# Altium PCB ArgoFCRev2.PcbDoc (part 1 of 6)
Units mm, origin at the board's own origin, x right, y up, seen from the top; angles counter-clockwise.
Board outline 140.21 x 119.63 mm, 4 copper layers (Top Layer, GND Plane, PWR Plane, Bottom Layer), stack 0.603 mm thick; 413 components, 223 nets, 1421 pads, 793 vias.
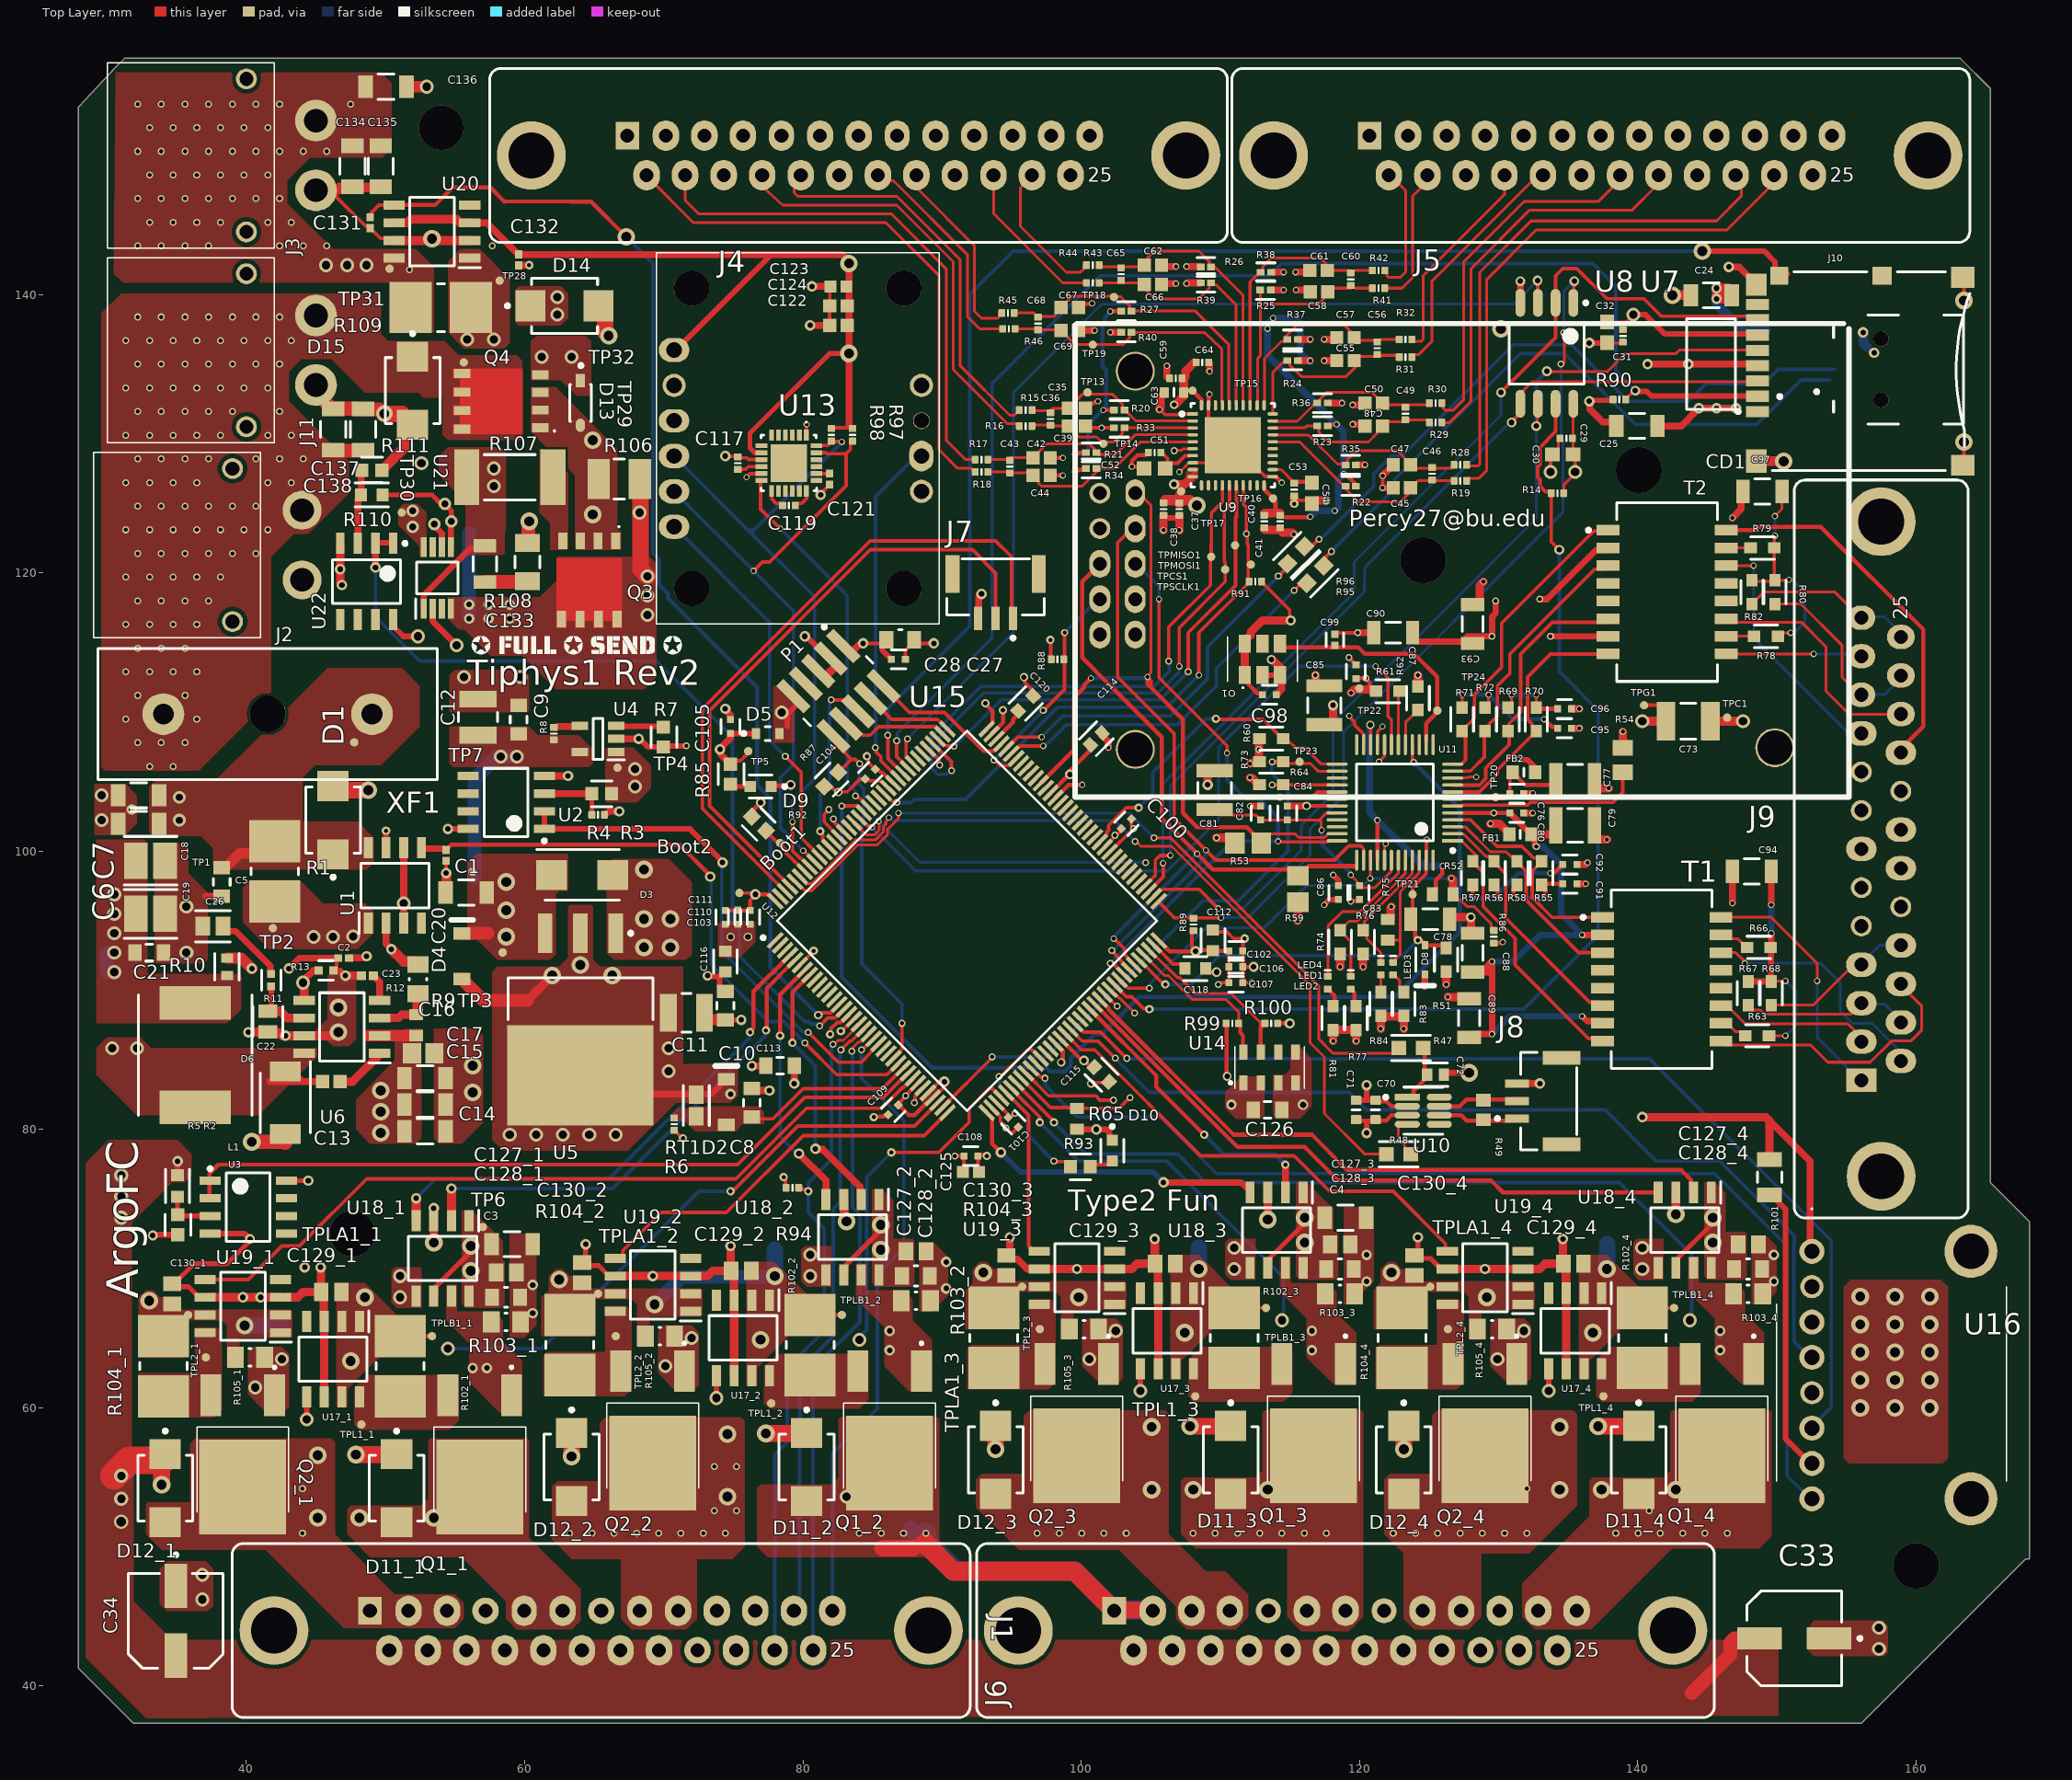
[diagram p0: Top Layer view]
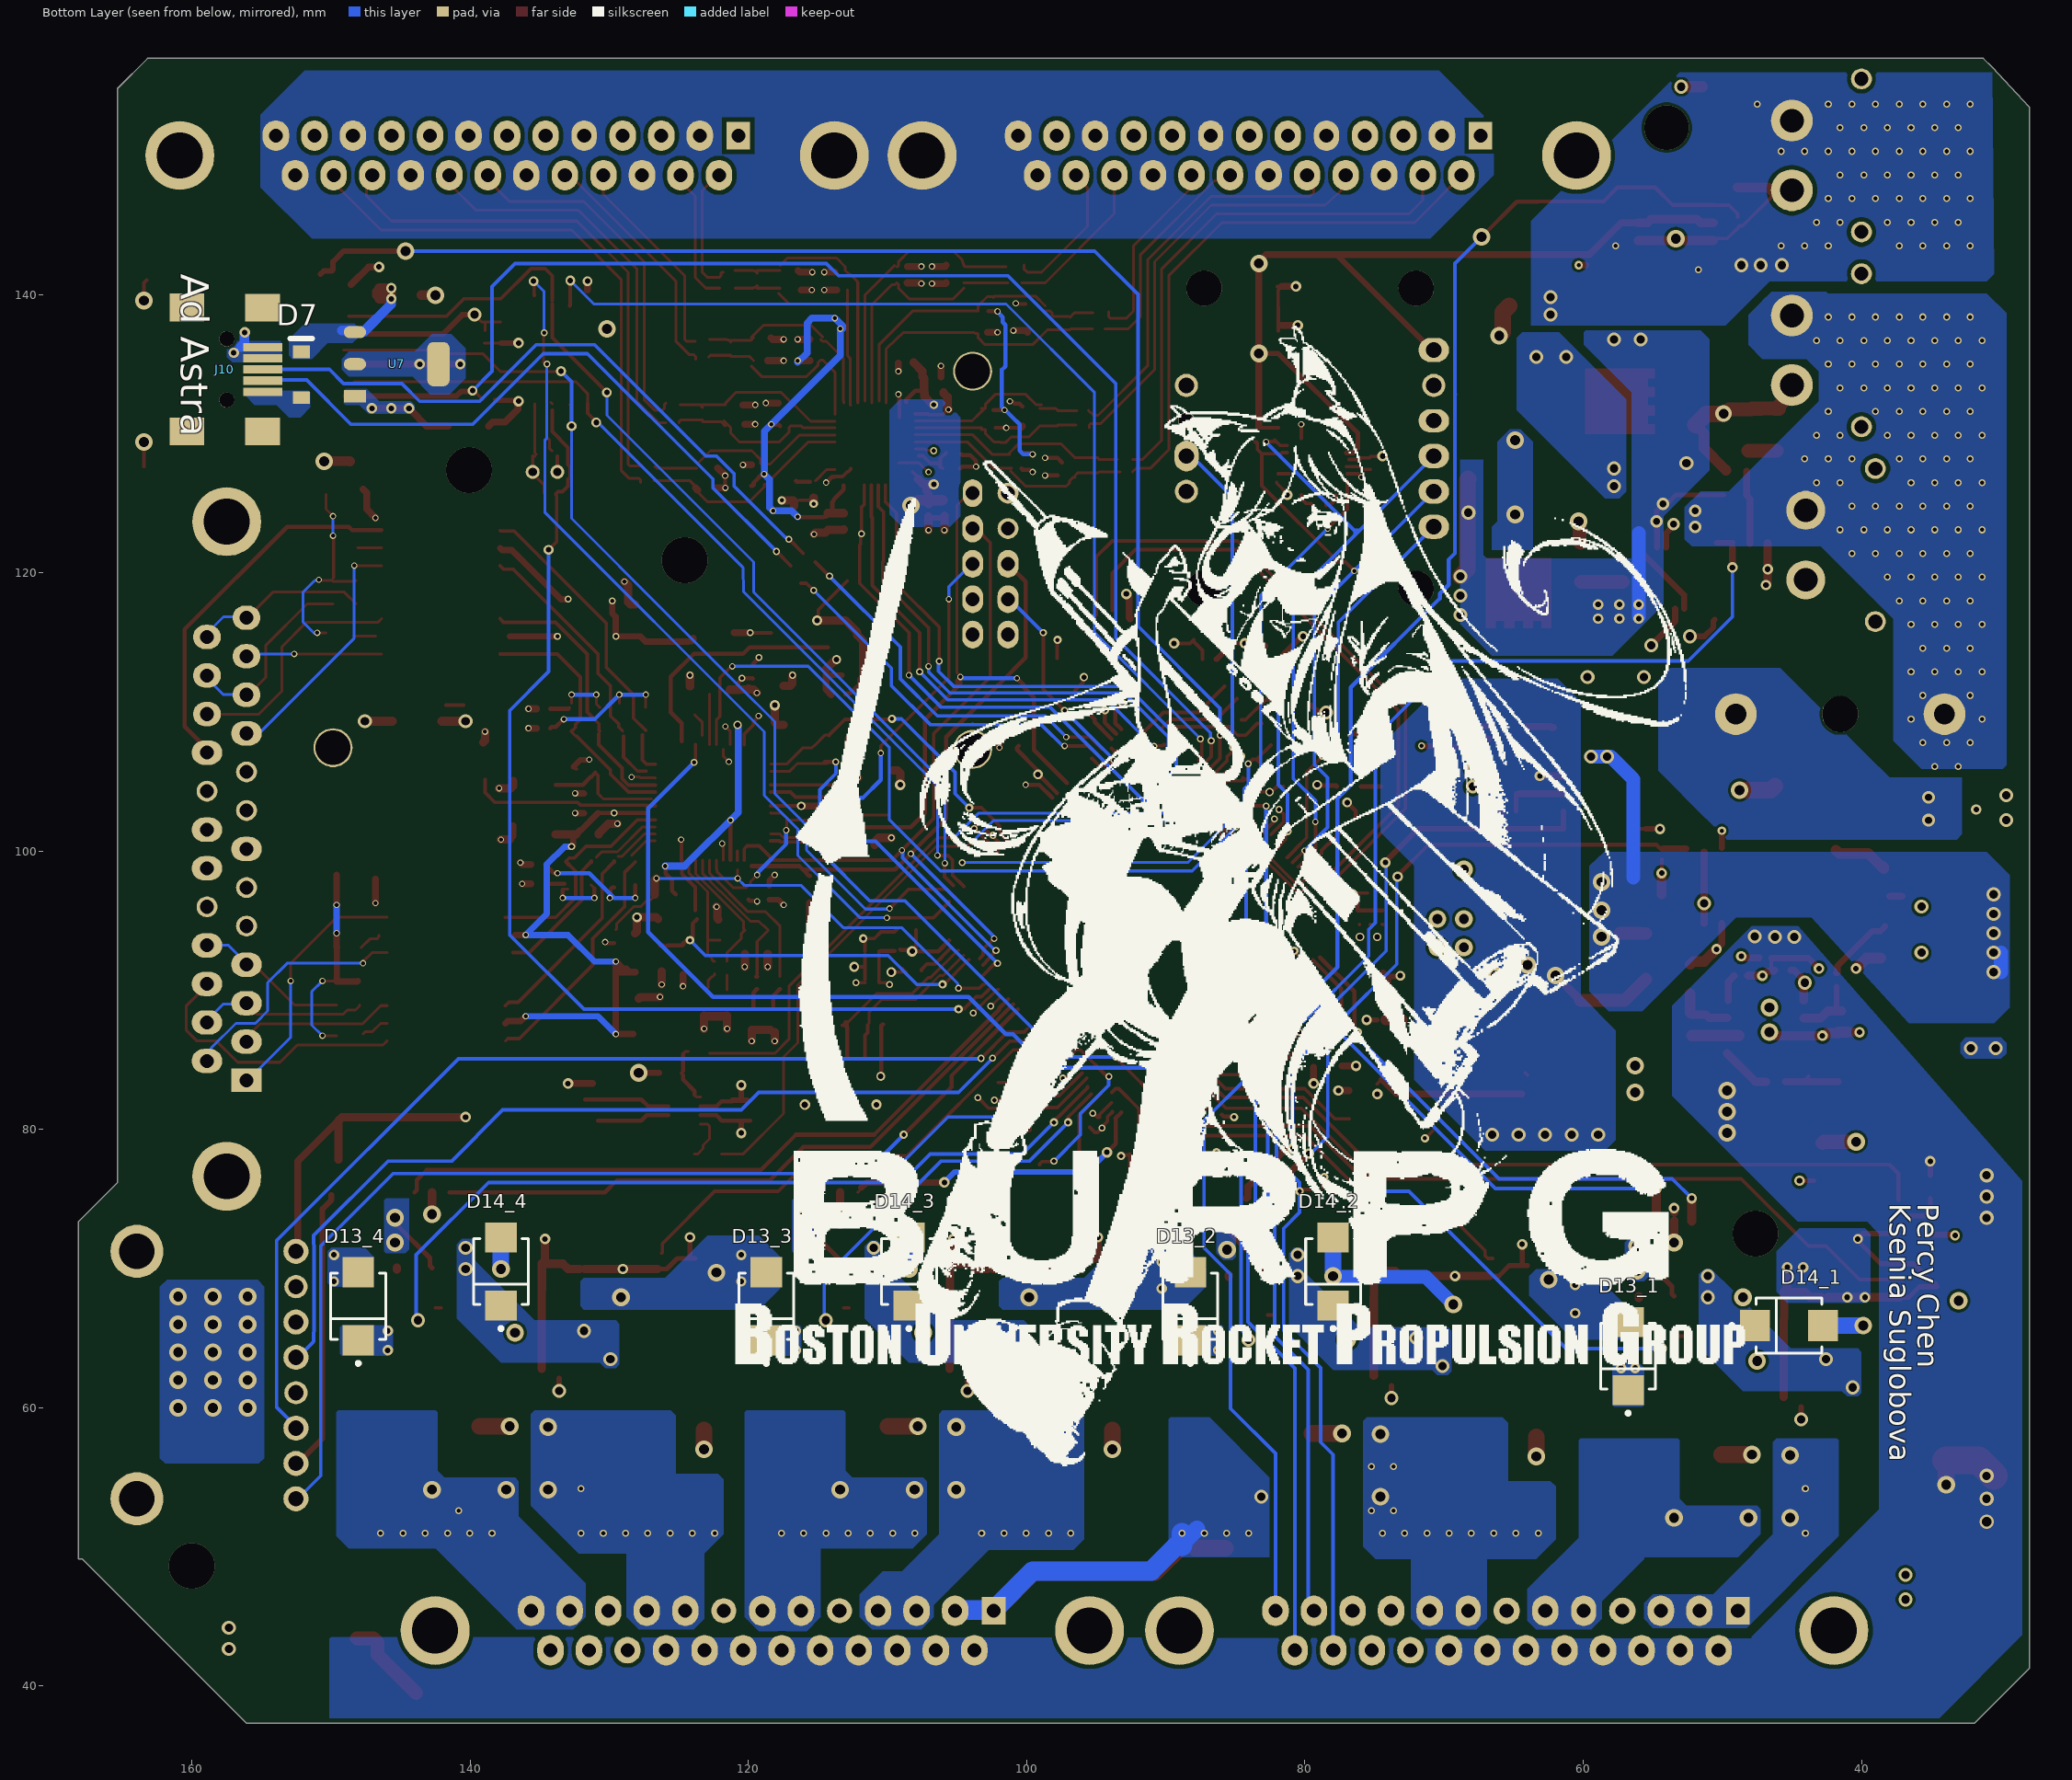
[diagram p1: Bottom Layer view, seen from below]
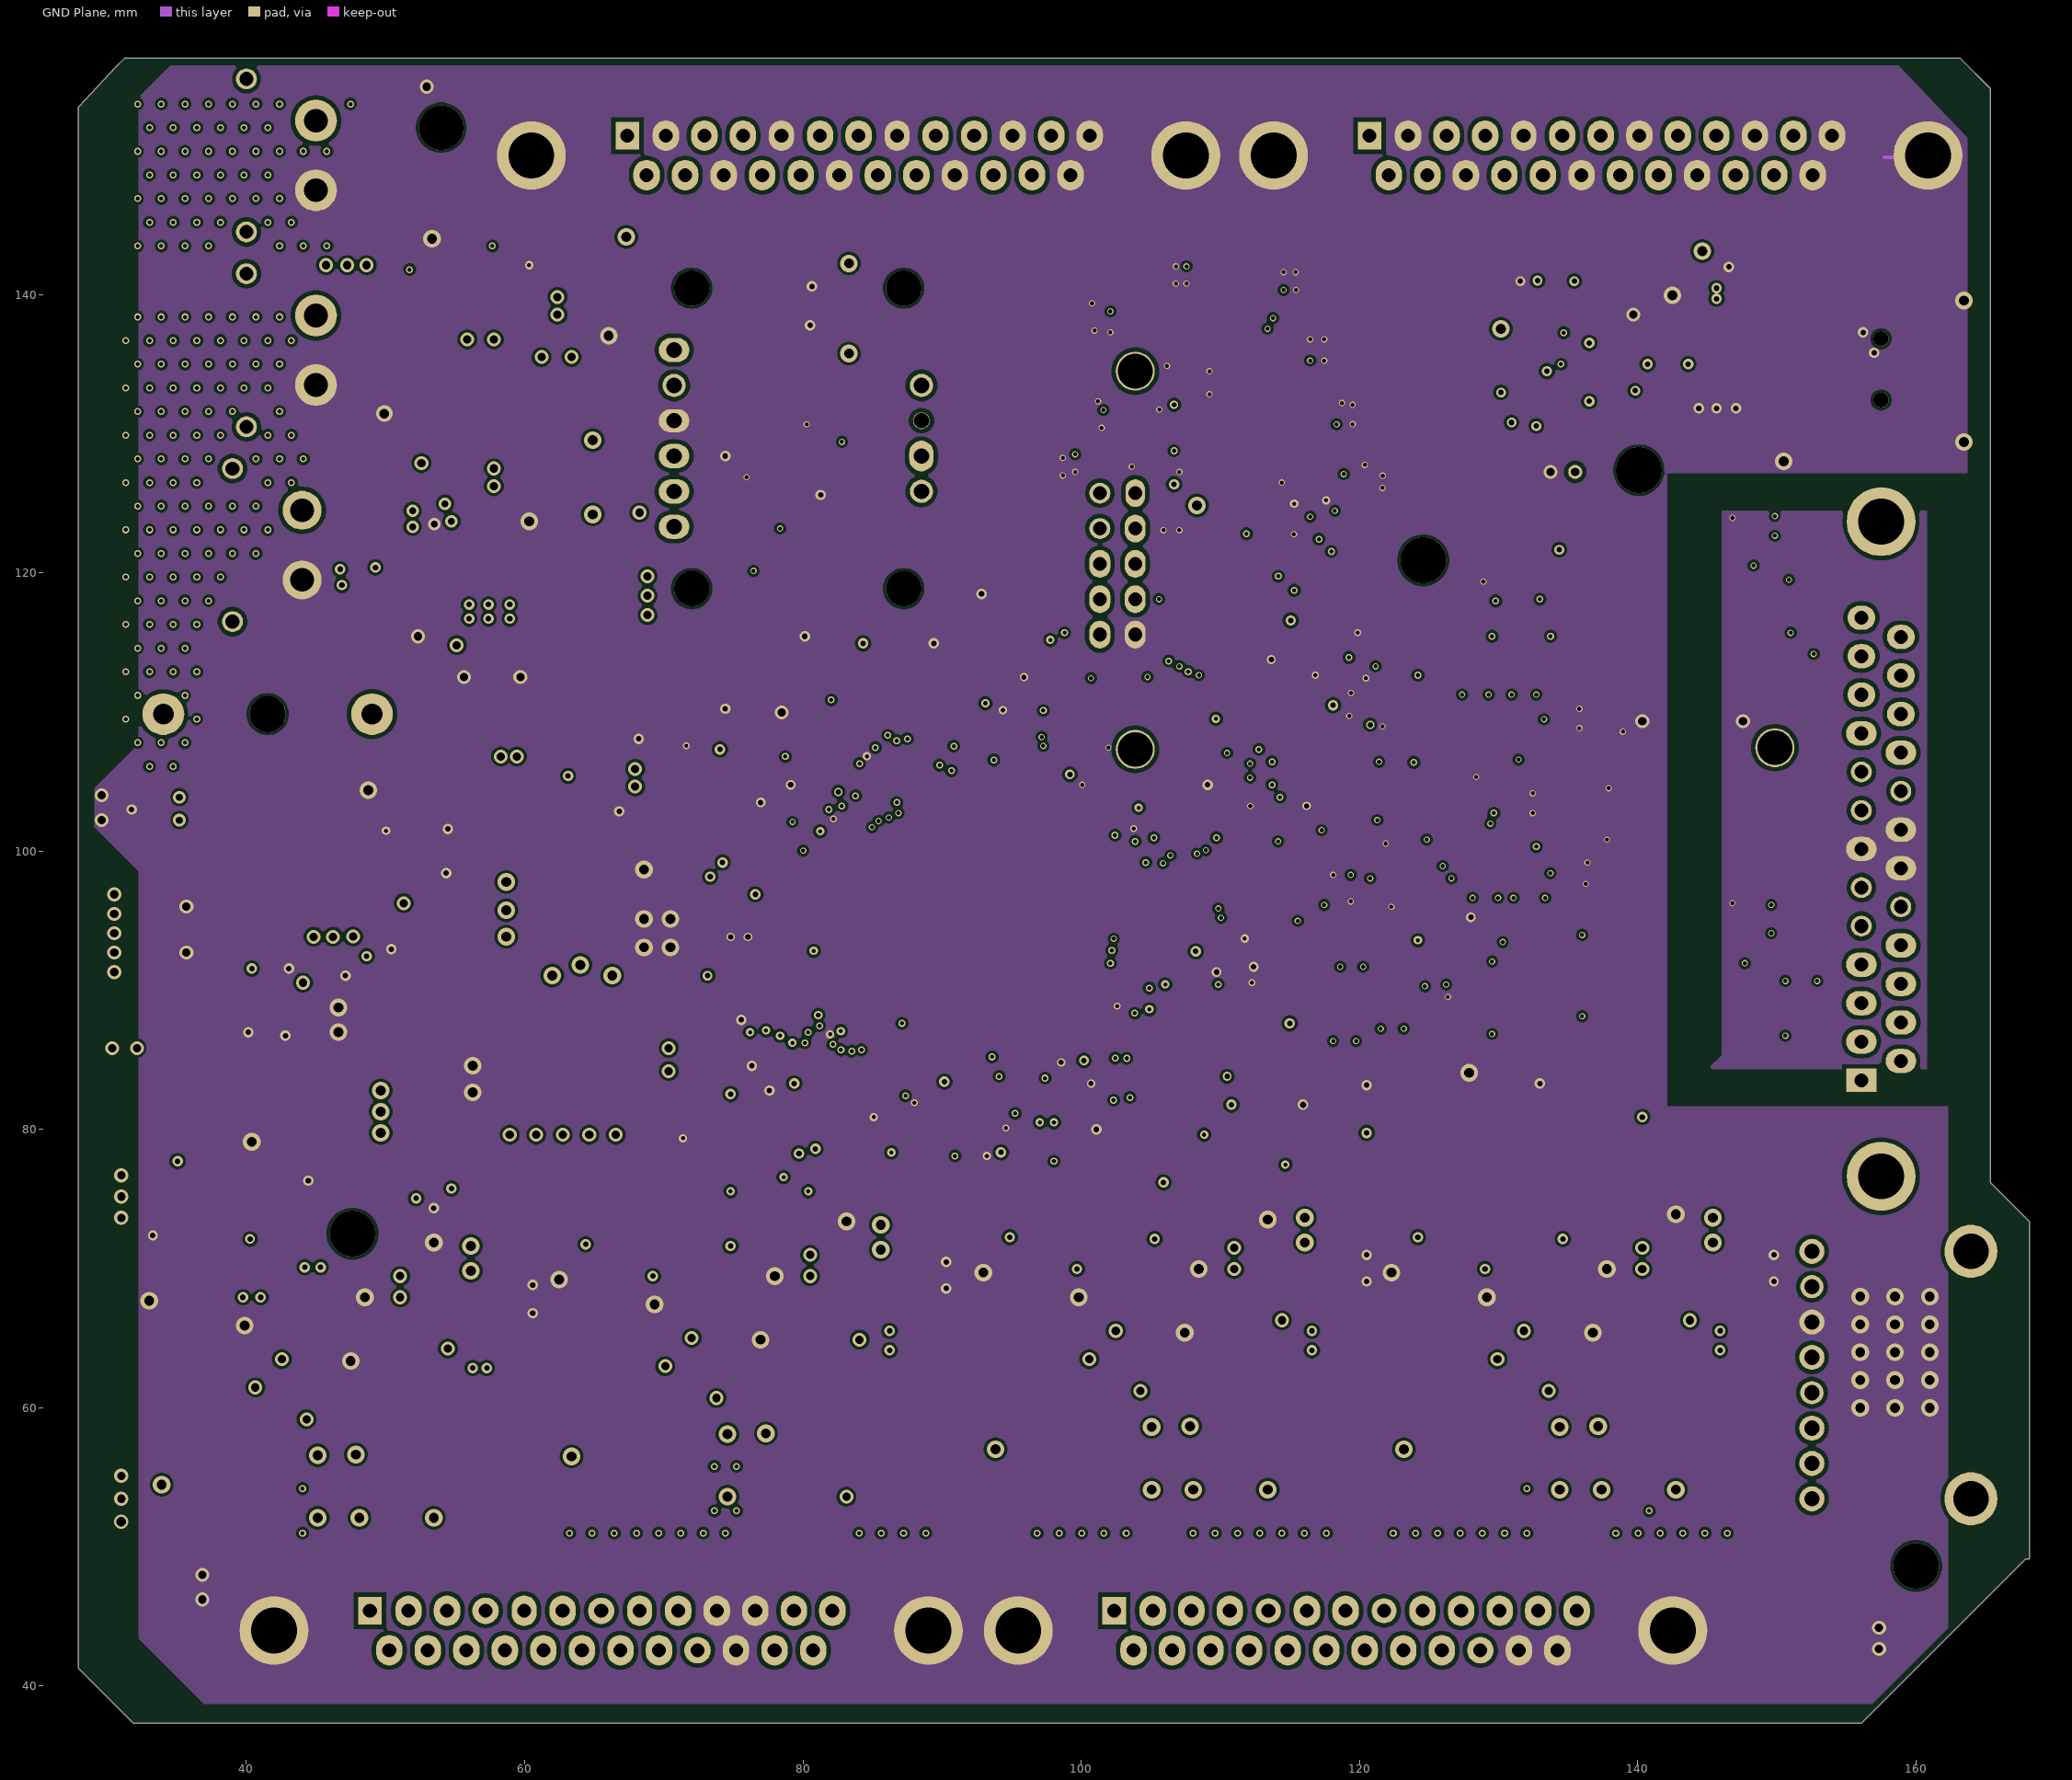
[diagram p2: GND Plane]
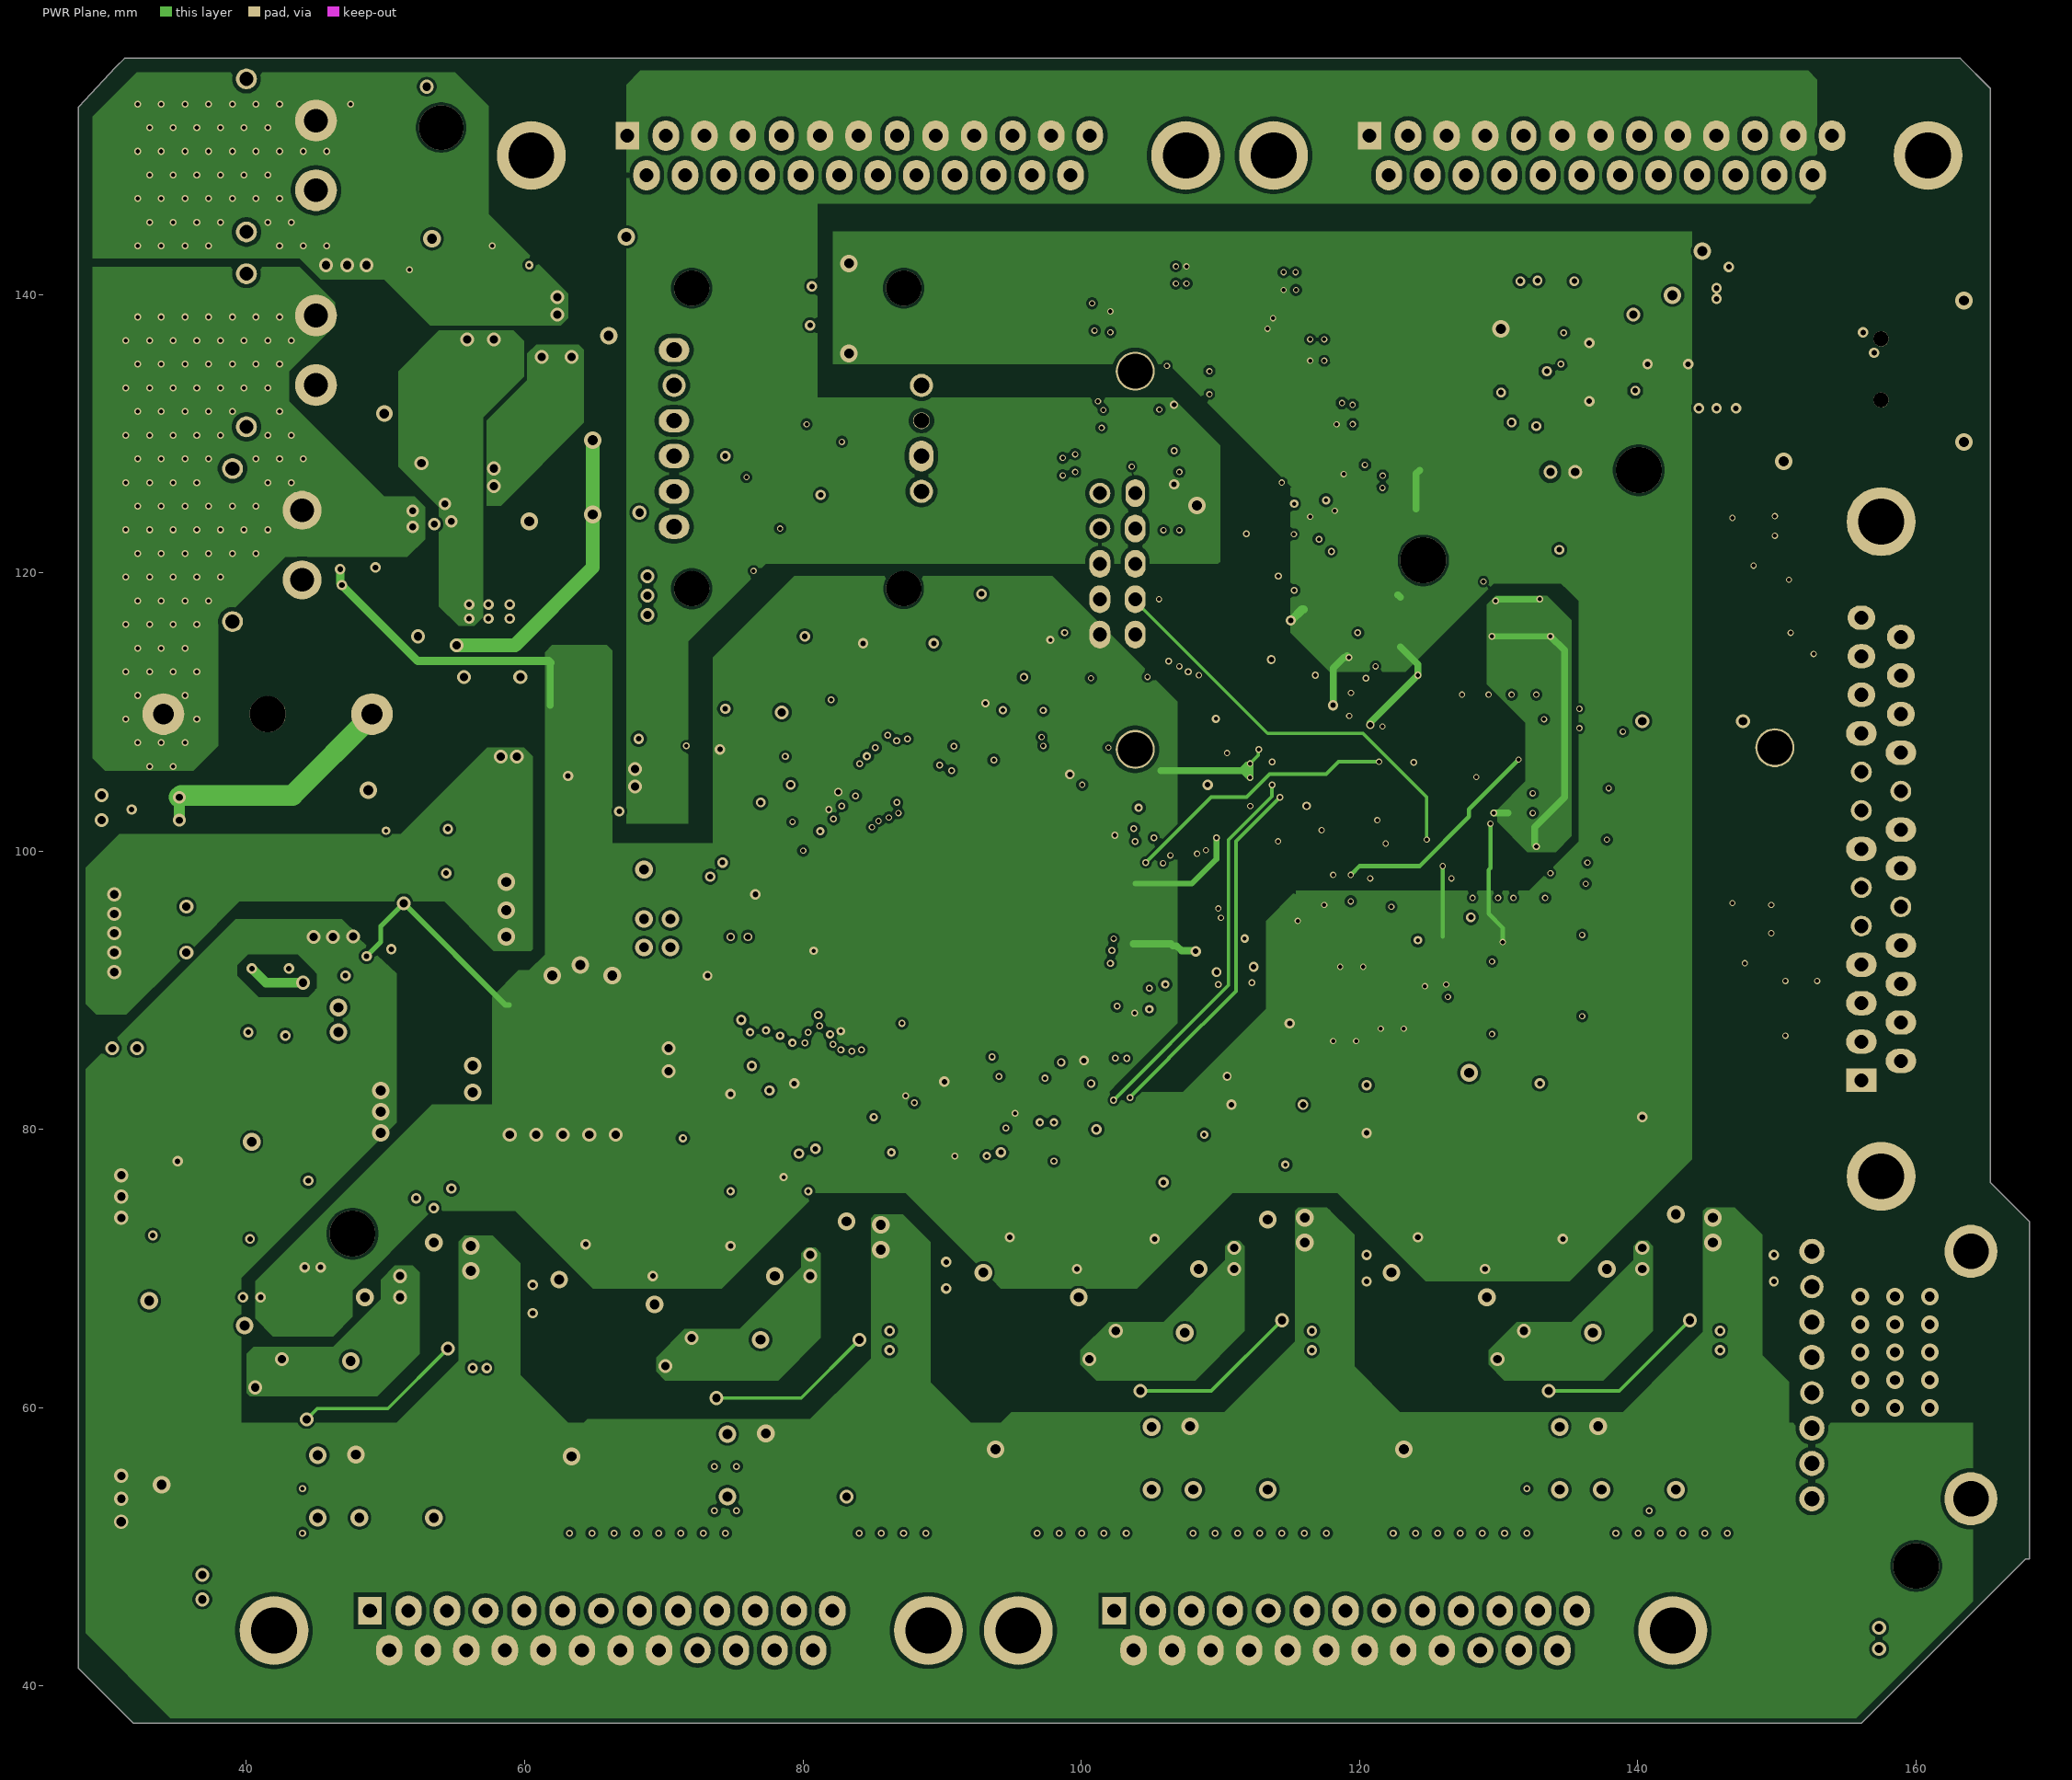
[diagram p3: PWR Plane]
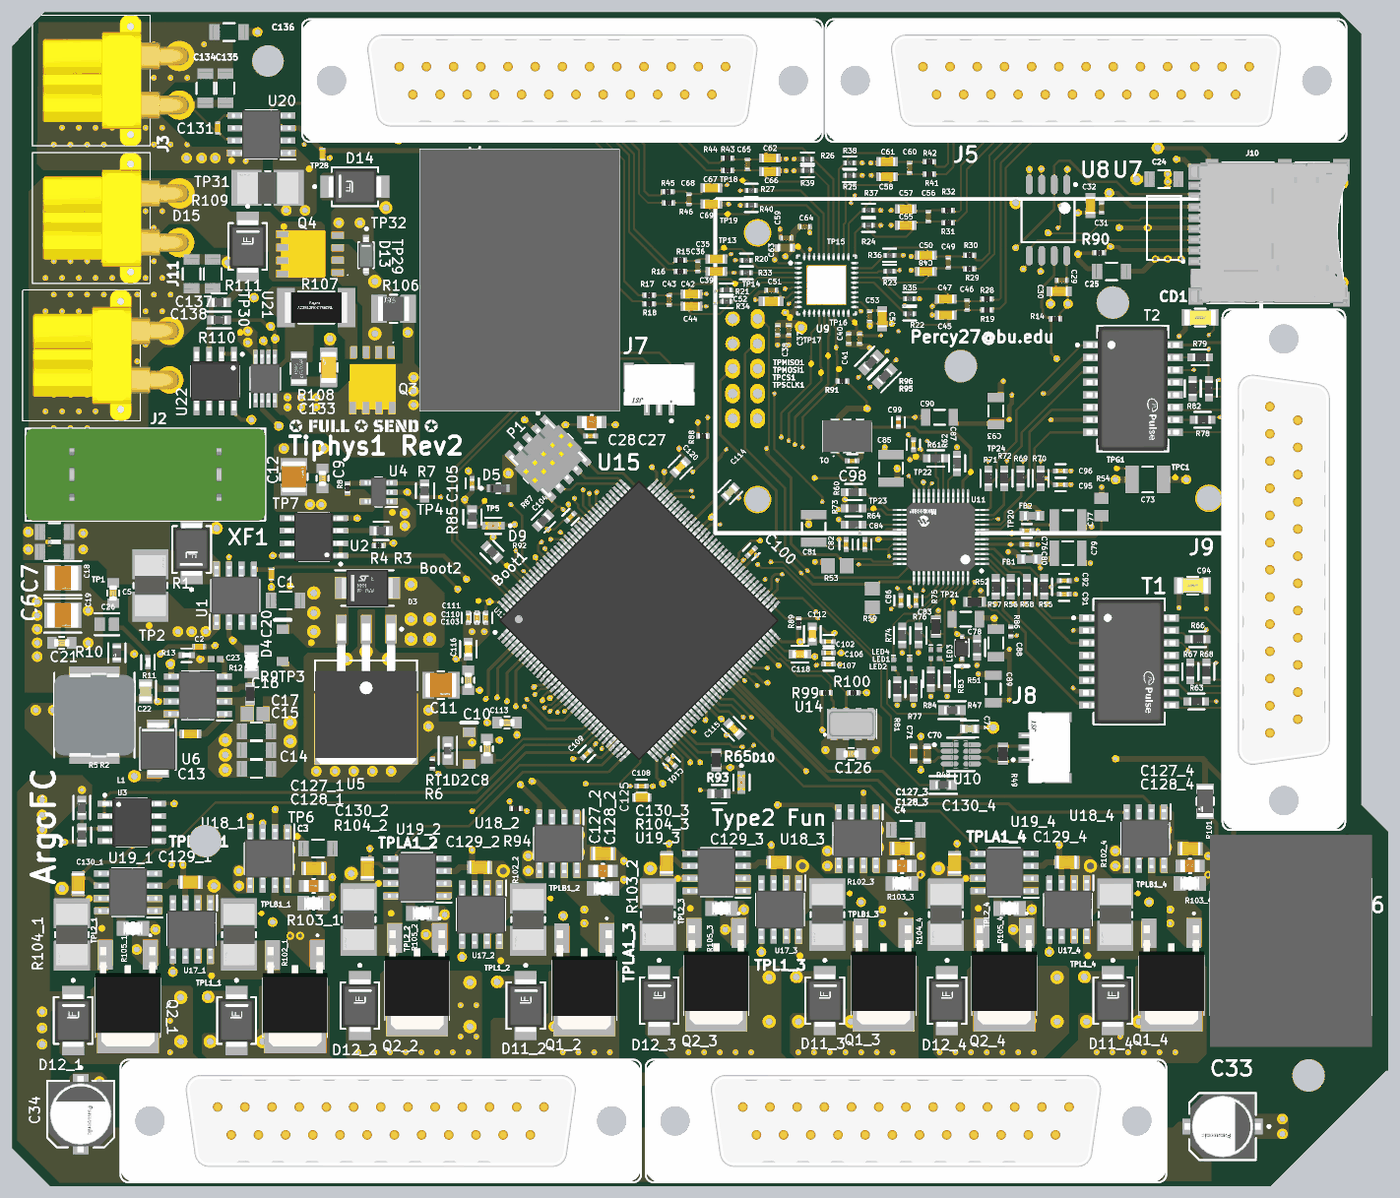
[diagram p8: 3D render of the assembled board from above, using the file's embedded part models]
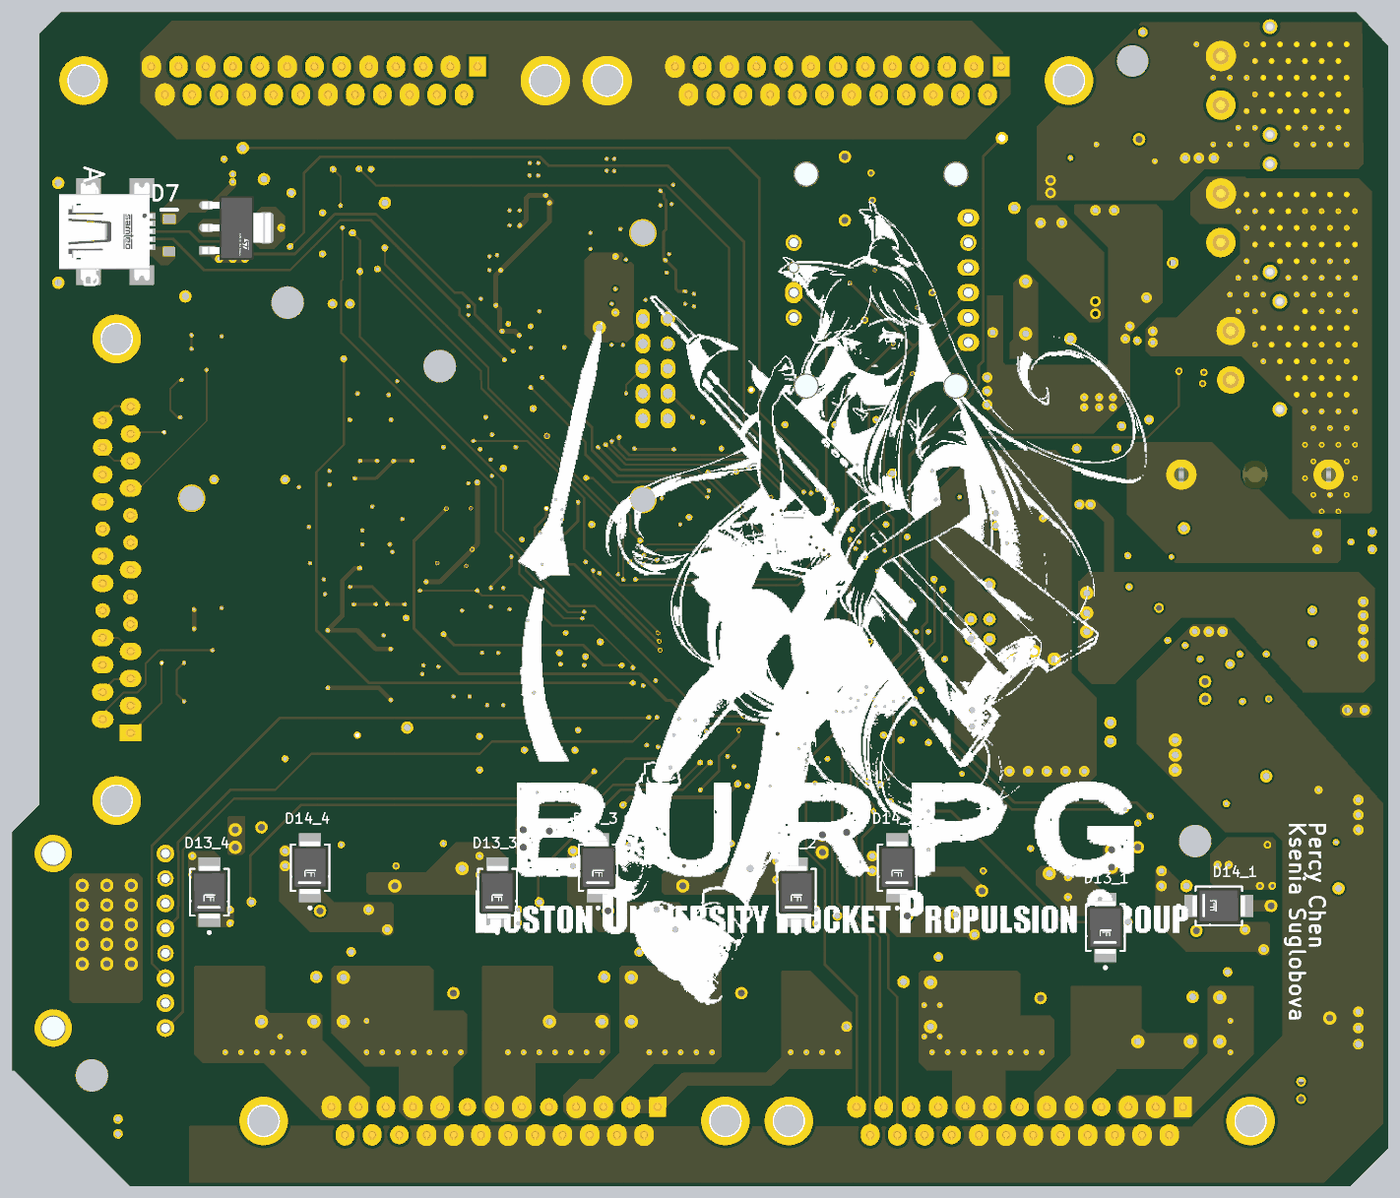
[diagram p9: 3D render of the assembled board from below, using the file's embedded part models]

## Layer stack, top to bottom
Top Solder: solder mask 0.0102, Solder Resist, Dk 3.5
Top Layer: signal copper 0.0356
Dielectric 2: prepreg 0.0711, PP-006, Dk 4.1
GND Plane: signal copper 0.035
Dielectric 1: dielectric 0.32, FR-4, Dk 4.8
PWR Plane: signal copper 0.035
Dielectric 3: prepreg 0.0711, PP-006, Dk 4.1
Bottom Layer: signal copper 0.0356
Bottom Solder: solder mask 0.0102, Solder Resist, Dk 3.5

## Board outline
30.607,156.337 31.242,156.972 163.195,156.972 165.354,154.813 165.354,76.2 168.148,73.406 168.148,49.149 167.894,49.149 156.083,37.338 31.877,37.338 27.94,41.275 27.94,153.48

## Design rules (kind name [scope] priority, off if disabled: settings)
Clearance [All] p1: gap=0.2 ignorepadtopadclearanceinfootprint=TRUE except(0.1: Arc-Arc Arc-Track Arc-SMDPad Track-Track Track-SMDPad; 0.15: Arc-Text Track-Text SMDPad-SMDPad SMDPad-THPad SMDPad-Text THPad-Text Via-Text Fill-Text Poly-Text Region-Text Text-Text; 0.254: Fill-Fill Fill-Poly Fill-Region Poly-Poly Poly-Region Region-Region; 0.28: Arc-THPad Track-THPad THPad-THPad THPad-Via; 0.3: THPad-Fill THPad-Poly THPad-Region)
ComponentClearance [All] p1 off: gap=0.1 collisioncheckmode=3 verticalgap=0.1 showdistances=FALSE
DiffPairsRouting DiffPairsRouting_1 [InDifferentialPair ('NewDifferentialPair1')] p1: maxlimit=0.254 minlimit=0.254 mostfreqgap=0.254 toplayer_minwidth=0.381 toplayer_maxwidth=0.381 toplayer_prefwidth=0.381 midlayer1_minwidth=0.381 midlayer1_maxwidth=0.381 midlayer1_prefwidth=0.381 midlayer2_minwidth=0.381 midlayer2_maxwidth=0.381 midlayer2_prefwidth=0.381 bottomlayer_minwidth=0.381 bottomlayer_maxwidth=0.381 bottomlayer_prefwidth=0.381 maxuncoupledlength=12.7
DiffPairsRouting [All] p2: maxlimit=0.254 minlimit=0.24 mostfreqgap=0.254 toplayer_minwidth=0.24 toplayer_maxwidth=0.5 toplayer_prefwidth=0.381 midlayer1_minwidth=0.24 midlayer1_maxwidth=0.5 midlayer1_prefwidth=0.381 midlayer2_minwidth=0.24 midlayer2_maxwidth=0.5 midlayer2_prefwidth=0.381 bottomlayer_mingap=0.254 bottomlayer_minwidth=0.24 bottomlayer_maxwidth=0.5 bottomlayer_prefwidth=0.381 maxuncoupledlength=12.7
HoleSize [All] p1: absolutevalues=TRUE maxlimit=10 minlimit=0.24 maxpercent=80.000 minpercent=20.000
HoleToHoleClearance [All] p1: gap=0.2 allowstackedmicrovias=TRUE
MatchedLengths [InDifferentialPair ('NewDifferentialPair1')] p1: tolerance=25.4 checknetsindiffpair=FALSE checkdiffpairvsdiffpair=TRUE checkxsignals=TRUE checkothers=TRUE
MinimumSolderMaskSliver [All] p1: minsoldermaskwidth=0.05
PlaneClearance [All] p1: clearance=0.6
PolygonConnect [All] p1: connectstyle=Direct reliefconductorwidth=0.254 reliefentries=4 polygonreliefangle="90 Angle" airgapwidth=0.254
RoutingVias [All] p1: holewidth=0.5 width=0.75 viastyle="Through Hole" minholewidth=0.15 minwidth=0.25 maxholewidth=30 maxwidth=30
SilkToSilkClearance [All] p1: silktosilkclearance=0.1
SilkToSolderMaskClearance [IsPad] p1: minsilkscreentomaskgap=0.05 clearancetoexposedcopper=TRUE
SolderMaskExpansion [All] p1: expansion=0.04 istentingtop=FALSE
SupplyNets "Schematic Supply Nets" [InNet('24Vin')] p1: voltage=0.000
SupplyNets "Schematic Supply Nets_1" [InNet('GND')] p2: voltage=0.000
SupplyNets "Schematic Supply Nets_5" [InNet('STM32VDD')] p3: voltage=0.000
SupplyNets "Schematic Supply Nets_4" [InNet('VDDA3.3V_CLEAN')] p4: voltage=0.000
SupplyNets "Schematic Supply Nets_3" [InNet('CHASSIS')] p5: voltage=0.000
SupplyNets "Schematic Supply Nets_2" [InNet('5V')] p6: voltage=0.000
UnRoutedNet [All] p1: checkbadconnections=TRUE
Width [All] p1: maxlimit=8 minlimit=0.16 preferedwidth=0.5 toplayer_maxwidth=6.35 toplayer_prefwidth=0.2 midlayer1_minwidth=0.2 midlayer2_minwidth=0.2 bottomlayer_maxwidth=6.35 bottomlayer_prefwidth=0.2 minimp=50.000000 maximp=50.000000 favimp=50.000000
21 further rules are at their usual default settings.

## Classes and differential pairs
component class BMS: C131 C132 C133 C134 C135 C136 C137 C138 D13 D14 D15 IC? J11 Q3 Q4 R106 R107 R108 R109 R110 R111 TP28 TP29 TP30 TP31 TP32 TP? U20 U21 U22 XF1
channel class Dual_LoadSwitch_Driver: SolenoidDriver1 SolenoidDriver2 SolenoidDriver3 SolenoidDriver4
component class SolenoidDriver4: C127_4 C128_4 C129_4 C130_4 D11_4 D12_4 D13_4 D14_4 Q1_4 Q2_4 R102_4 R103_4 R104_4 R105_4 TP27_4 TP28_4 TPL1_4 TPL2_4 TPLA1_4 TPLB1_4 U17_4 U18_4 U19_4
component class SolenoidDriver3: C127_3 C128_3 C129_3 C130_3 D11_3 D12_3 D13_3 D14_3 Q1_3 Q2_3 R102_3 R103_3 R104_3 R105_3 TP27_3 TP28_3 TPL1_3 TPL2_3 TPLA1_3 TPLB1_3 U17_3 U18_3 U19_3
component class SolenoidDriver2: C127_2 C128_2 C129_2 C130_2 D11_2 D12_2 D13_2 D14_2 Q1_2 Q2_2 R102_2 R103_2 R104_2 R105_2 TP27_2 TP28_2 TPL1_2 TPL2_2 TPLA1_2 TPLB1_2 U17_2 U18_2 U19_2
component class SolenoidDriver1: C127_1 C128_1 C129_1 C130_1 D11_1 D12_1 D13_1 D14_1 Q1_1 Q2_1 R102_1 R103_1 R104_1 R105_1 TP27_1 TP28_1 TPL1_1 TPL2_1 TPLA1_1 TPLB1_1 U17_1 U18_1 U19_1
component class U_STM32: Boot1 Boot2 C100 C101 C102 C103 C104 C105 C106 C107 C108 C109 C110 C111 C112 C113 C114 C115 C116 C117 C118 C119 C120 C121 C122 C123 C124 C125 C126 D9 D10 J10 R85 R86 R87 R88 R89 R90 R91 R92 R93 R94 R95 R96 R97 R98 R99 R100 R101 U12 U13 U14 U15 U16

## Components (designator, comment, footprint, x,y, rotation, side; value= is the part's Value field where it differs from the comment)
Boot1 "TPAD6R" TP06R#1 78.359,100.33 r90 top
Boot2 "TPAD6R" TP06R#2 75.438,100.33 r90 top
C1 "Capacitor 0.1 uF +/- 5% 16 V 0402" CAPC1005X56X25LL10T15 54.356,99.695 r90 top value=100nF
C2 "Capacitor 0.1 uF +/- 5% 16 V 0402" CAPC1005X56X25LL10T15 46.99,92.329 r180 top value=100nF
C3 "10uF" FP-GRM31-0_2-MFG 59.104,71.755 r0 top
C4 "10uF" FP-GRM31-0_2-MFG 118.999,73.66 r0 top
C5 "100nF" FP-CGA3E-0_3-0_1-IPC_A 38.227,97.79 r270 top
C6 "10uF" FP-GRM31-0_2-MFG 32.258,101.981 r0 top
C7 "10uF" FP-GRM31-0_2-MFG 32.258,104.013 r0 top
C8 "100nF" FP-CGA3E-0_3-0_1-IPC_A 76.327,81.915 r90 top
C9 "100nF" FP-CGA3E-0_3-0_1-IPC_A 59.563,109.474 r90 top
C10 "100nF" FP-CGA3E-0_3-0_1-IPC_A 74.422,88.9 r270 top
C11 "47uF" FP-C1210C476M4PACTU-MFG 71.628,88.392 r0 top
C12 "47uF" FP-C1210C476M4PACTU-MFG 56.642,109.631 r90 top
C13 "Capacitor 100 nF +/-10% 50 V 0603" CAPC1608X90X40NL10T20 46.101,83.439 r180 top value=100nF
C14 "10uF" FP-GRM31-0_2-MFG 52.832,79.883 r0 top
C15 "10uF" FP-GRM31-0_2-MFG 52.832,83.693 r0 top
C16 "10uF" FP-GRM31-0_2-MFG 52.832,81.788 r180 top
C17 "100nF" CAPC2013X100X50NL20T25 52.705,85.471 r180 top
C18 "47uF" FP-GRM32E-0_3-0_2-IPC_C 33.1,99.314 r0 top
C19 "47uF" FP-GRM32E-0_3-0_2-IPC_C 33.1,95.504 r0 top
C20 "10uF" FP-GRM31-0_2-MFG 55.802,97.028 r0 top
C21 "100nF" FP-CGA3E-0_3-0_1-IPC_A 33,92.71 r0 top
C22 "10pF" FP-C0805C-DN-MFG 41.529,87.757 r270 top value="10 pF"
C23 "8.2nF" CAPC1005X55X25NL05T10 48.7,91.059 r0 top
C24 "10uF" FP-GRM31-0_2-MFG 145.288,139.954 r0 top
C25 "10uF" FP-GRM31-0_2-MFG 139.954,130.556 r180 top
C26 "2.2nF" FP-CL21-IPC_C 37.592,94.615 r180 top
C27 "100nF" FP-CC0402-MFG 86.868,113.792 r0 top value="100 nF"
C28 "1uF" FP-0805-L_2_01_0_2-W_1_25-MFG 86.995,115.189 r0 top
C29 "Capacitor 100nF +/-20% 25V 0402" CAPC0402(1005)60_L 134.874,129.667 r180 top value=100nF
C30 "Capacitor 1 uF +/- 10% 16 V 0603" CAPC1608X94X35NL15T15 134.62,128.524 r180 top value=1µF
C31 "Capacitor 100nF +/-20% 25V 0402" CAPC0402(1005)60_L 138.938,137.033 r90 top value=100nF
C32 "Capacitor 1 uF +/- 10% 16 V 0603" CAPC1608X94X35NL15T15 137.795,137.287 r90 top value=1µF
C33 "22uF" FP-FKD-MFG 151.257,43.434 r180 top
C34 "22uF" FP-FKD-MFG 34.925,44.704 r270 top
C35 "Capacitor 1nF +/-20% 50V 0402" CAPC1608X90X40NL10T20 99.695,131.826 r0 top value=1nF
C36 "Capacitor 10nF +/-20% 50V 0402" CAPC0402(1005)60_L 97.79,131.064 r270 top value=10nF
C37 "Capacitor 100nF +/-20% 50V 0402" CAPC0402(1005)60_L 107.061,124.587 r270 top value=100nF
C38 "Capacitor 10nF +/-20% 50V 0402" CAPC0402(1005)60_L 105.918,124.587 r270 top value=10nF
C39 "Capacitor 1nF +/-20% 50V 0402" CAPC1608X90X40NL10T20 99.695,130.556 r0 top value=1nF
C40 "Capacitor 100nF +/-20% 50V 0402" CAPC0402(1005)60_L 113.157,123.698 r270 top value=100nF
C41 "Capacitor 10nF +/-20% 50V 0402" CAPC0402(1005)60_L 114.3,123.698 r270 top value=10nF
C42 "Capacitor 1nF +/-20% 50V 0402" CAPC1608X90X40NL10T20 97.155,128.27 r180 top value=1nF
C43 "Capacitor 10nF +/-20% 50V 0402" CAPC0402(1005)60_L 94.869,127.635 r270 top value=10nF
C44 "Capacitor 1nF +/-20% 50V 0402" CAPC1608X90X40NL10T20 97.155,127 r0 top value=1nF
C45 "Capacitor 1nF +/-20% 50V 0402" CAPC1608X90X40NL10T20 123.063,126.111 r0 top value=1nF
C46 "Capacitor 10nF +/-20% 50V 0402" CAPC0402(1005)60_L 125.222,127.127 r90 top value=10nF
C47 "Capacitor 1nF +/-20% 50V 0402" CAPC1608X90X40NL10T20 123.063,127.762 r180 top value=1nF
C48 "Capacitor 1nF +/-20% 50V 0402" CAPC1608X90X40NL10T20 121.031,130.556 r0 top value=1nF
C49 "Capacitor 10nF +/-20% 50V 0402" CAPC0402(1005)60_L 123.305,131.445 r90 top value=10nF
C50 "Capacitor 1nF +/-20% 50V 0402" CAPC1608X90X40NL10T20 121.031,132.207 r180 top value=1nF
C51 "Capacitor 100nF +/-20% 50V 0402" CAPC0402(1005)60_L 105.283,128.651 r180 top value=100nF
C52 "Capacitor 1 uF +/- 10% 16 V 0603" CAPC1608X94X35NL15T15 105.283,127.508 r180 top value=1µF
C53 "Capacitor 100nF +/-20% 50V 0402" CAPC0402(1005)60_L 115.316,125.984 r270 top value=100nF
C54 "Capacitor 1 uF +/- 10% 16 V 0603" CAPC1608X94X35NL15T15 116.586,125.73 r270 top value=1µF
C55 "Capacitor 1nF +/-20% 50V 0402" CAPC1608X90X40NL10T20 118.999,135.255 r0 top value=1nF
C56 "Capacitor 10nF +/-20% 50V 0402" CAPC0402(1005)60_L 121.285,136.144 r90 top value=10nF
C57 "Capacitor 1nF +/-20% 50V 0402" CAPC1608X90X40NL10T20 118.999,136.906 r180 top value=1nF
C58 "Capacitor 1nF +/-20% 50V 0402" CAPC1608X90X40NL10T20 117.094,140.208 r0 top value=1nF
C59 "Capacitor 100nF +/-20% 50V 0402" CAPC0402(1005)60_L 106.807,133.985 r180 top value=100nF
C60 "Capacitor 10nF +/-20% 50V 0402" CAPC0402(1005)60_L 119.38,141.097 r90 top value=10nF
C61 "Capacitor 1nF +/-20% 50V 0402" CAPC1608X90X40NL10T20 117.064,141.732 r180 top value=1nF
C62 "Capacitor 1nF +/-20% 50V 0402" CAPC1608X90X40NL10T20 105.156,142.113 r180 top value=1nF
C63 "Capacitor 4.7µF +/-20% 10V 0603" CAPC0603(1608)100_L 106.68,132.969 r180 top value=4.7µF
C64 "Capacitor 100nF +/-20% 50V 0402" CAPC0402(1005)60_L 108.712,135.128 r0 top value=100nF
C65 "Capacitor 10nF +/-20% 50V 0402" CAPC0402(1005)60_L 102.87,141.478 r270 top value=10nF
C66 "Capacitor 1nF +/-20% 50V 0402" CAPC1608X90X40NL10T20 105.156,140.716 r0 top value=1nF
C67 "Capacitor 1nF +/-20% 50V 0402" CAPC1608X90X40NL10T20 99.187,139.065 r180 top value=1nF
C68 "Capacitor 10nF +/-20% 50V 0402" CAPC0402(1005)60_L 96.901,137.922 r90 top value=10nF
C69 "Capacitor 1nF +/-20% 50V 0402" CAPC1608X90X40NL10T20 99.187,137.414 r0 top value=1nF
C70 "Capacitor 100nF +/-20% 50V 0402" CAPC0603(1608)100_L 121.158,81.407 r90 top value=100nF
C71 "Capacitor 2,2µF +/-20% 10V 0402" CAPC0603(1608)100_L 119.761,81.407 r90 top value=2.2µF
C72 "2.2pF" FP-C0603C-CF-MFG 125.476,83.947 r0 top value="2.2 pF"
C73 "CAP 1nF 100V 1210(3225)" CAPC1210(3225)170_M 143.637,109.347 r0 top value=1nF
C76 "0.1µF" FP-CC0402-MFG 131.318,104.14 r0 top value="100 nF"
C77 "22uF" CAPC1210(3225)280_L 135.509,105.029 r180 top
C78 "10µF" CAPC1206(3216)190_L 125.095,95.123 r180 top value=10uF
C79 "22uF" CAPC1210(3225)280_L 135.509,101.854 r180 top
C80 "0.1µF" FP-CC0402-MFG 131.318,102.743 r0 top value="100 nF"
C81 "22uF" CAPC1210(3225)280_L 109.601,104.394 r90 top
C82 "0.1µF" FP-CC0402-MFG 112.903,102.743 r90 top value="100 nF"
C83 "0.1µF" FP-CC0402-MFG 120.015,97.028 r270 top value="100 nF"
C84 "0.1µF" FP-CC0402-MFG 114.808,102.743 r90 top value="100 nF"
C85 "22uF" CAPC1210(3225)280_L 117.475,110.49 r270 top
C86 "0.1µF" FP-CC0402-MFG 118.491,97.028 r90 top value="100 nF"
C87 "0.1µF" FP-CC0402-MFG 119.761,112.895 r270 top value="100 nF"
C88 "10µF" CAPC1206(3216)190_L 128.143,92.71 r270 top value=10uF
C89 "10µF" CAPC1206(3216)190_L 127.889,88.008 r270 top value=10uF
C90 "10µF" CAPC1206(3216)190_L 122.428,115.697 r0 top value=10uF
C91 "0.1µF" FP-CC0402-MFG 135.128,97.663 r0 top value="100 nF"
C92 "0.1µF" FP-CC0402-MFG 135.128,99.06 r0 top value="100 nF"
C93 "10µF" CAPC1206(3216)190_L 128.143,116.332 r270 top value=10uF
C94 "1000pF" FP-C1206C-EF-MFG 148.209,98.552 r180 top
C95 "0.1µF" FP-CC0402-MFG 134.747,108.839 r0 top value="100 nF"
C96 "0.1µF" FP-CC0402-MFG 134.747,110.236 r0 top value="100 nF"
C97 "1000pF" FP-C1206C-EF-MFG 148.971,125.857 r180 top
C98 "0.1µF" FP-CC0402-MFG 113.538,111.252 r0 top value="100 nF"
C99 "18pF" FP-C0402-BB-MFG 118.237,115.189 r90 top value="18 pF"
C100 "100nF" FP-CC0402-MFG 103.251,101.981 r45 top value="100 nF"
C101 "100nF" FP-CC0402-MFG 95.123,80.518 r315 top value="100 nF"
C102 "100nF" FP-CC0402-MFG 111.125,92.837 r0 top value="100 nF"
C103 "100nF" FP-CC0402-MFG 76.2,95.25 r270 top value="100 nF"
C104 "100nF" FP-CC0402-MFG 84.836,105.537 r45 top value="100 nF"
C105 "100nF" FP-CC0402-MFG 74.803,108.966 r90 top value="100 nF"
C106 "100nF" FP-CC0402-MFG 111.125,91.694 r0 top value="100 nF"
C107 "100nF" FP-CC0402-MFG 111.125,90.551 r0 top value="100 nF"
C108 "100nF" FP-CC0402-MFG 92.075,78.105 r0 top value="100 nF"
C109 "100nF" FP-CC0402-MFG 86.487,81.407 r225 top value="100 nF"
C110 "100nF" FP-CC0402-MFG 75.311,95.258 r270 top value="100 nF"
C111 "100nF" FP-CC0402-MFG 74.422,95.25 r270 top value="100 nF"
C112 "22uF" FP-CC0603-DA-MFG 109.474,93.599 r90 top value="2.2 uF"
C113 "100nF" FP-CGA3E-0_3-0_1-IPC_A 78.359,84.582 r180 top
C114 "2.2pF" FP-C0603C-CF-MFG 101.092,108.077 r45 top value="2.2 pF"
C115 "CC0603MRX5R6BB225" FP-CC0603-DA-MFG 101.473,83.947 r315 top value="2.2 uF"
C116 "22uF" FP-CC0603-DA-MFG 74.422,92.075 r90 top value="2.2 uF"
C117 "Capacitor 100nF +/-20% 25V 0402" CAPC0402(1005)60_L 75.311,127.889 r90 top value=100nF
C118 "2.2uF" FP-CC0603-DA-MFG 108.204,91.567 r0 top value="2.2 uF"
C119 "Capacitor 100nF +/-20% 25V 0402" CAPC0402(1005)60_L 78.994,124.841 r180 top value=100nF
C120 "2.2uF" FP-CC0603-DA-MFG 96.012,110.617 r45 top value="2.2 uF"
C121 "2.2nF" CAPC1005X60X26LL10T16 81.915,126.746 r90 top
C122 "Capacitor 100 nF +/-10% 50 V 0603" CAPC1608X90X40NL10T20 82.55,137.795 r0 top value=10nF
C123 "Capacitor 1 uF +/- 10% 25 V 0603" CAPC1608X90X40LL10T20 82.55,140.589 r0 top value=0.1µF
C124 "Capacitor 100 nF +/-10% 50 V 0603" CAPC1608X90X40NL10T20 82.55,139.192 r0 top value=10nF
C125 "Capacitor 1 uF +/- 10% 25 V 0603" CAPC1608X90X40LL10T20 92.075,76.962 r180 top value=0.1µF
C126 "100nF" FP-CGA3E-0_3-0_1-IPC_A 113.411,81.407 r0 top
C127_1 "Capacitor 100 nF +/-10% 50 V 0805" CAPC2013X95X50LL10T25 58.674,69.723 r180 top value=100nF (schematic designator C127)
C127_2 "Capacitor 100 nF +/-10% 50 V 0805" CAPC2013X95X50LL10T25 88.138,71.247 r180 top value=100nF (schematic designator C127)
C127_3 "Capacitor 100 nF +/-10% 50 V 0805" CAPC2013X95X50LL10T25 118.618,71.755 r180 top value=100nF (schematic designator C127)
C127_4 "Capacitor 100 nF +/-10% 50 V 0805" CAPC2013X95X50LL10T25 147.955,71.755 r180 top value=100nF (schematic designator C127)
C128_1 "1uF" FP-0805-L_2_01_0_2-W_1_25-MFG 58.658,67.945 r0 top (schematic designator C128)
C128_2 "1uF" FP-0805-L_2_01_0_2-W_1_25-MFG 88.122,69.469 r0 top (schematic designator C128)
C128_3 "1uF" FP-0805-L_2_01_0_2-W_1_25-MFG 118.602,69.977 r0 top (schematic designator C128)
C128_4 "1uF" FP-0805-L_2_01_0_2-W_1_25-MFG 147.939,69.977 r0 top (schematic designator C128)
C129_1 "Capacitor 100 nF +/-10% 50 V 0805" CAPC2013X95X50LL10T25 46.101,68.326 r180 top value=100nF (schematic designator C129)
C129_2 "Capacitor 100 nF +/-10% 50 V 0805" CAPC2013X95X50LL10T25 75.565,69.85 r180 top value=100nF (schematic designator C129)
C129_3 "Capacitor 100 nF +/-10% 50 V 0805" CAPC2013X95X50LL10T25 106.045,70.358 r180 top value=100nF (schematic designator C129)
C129_4 "Capacitor 100 nF +/-10% 50 V 0805" CAPC2013X95X50LL10T25 135.382,70.358 r180 top value=100nF (schematic designator C129)
C130_1 "Capacitor 100 nF +/-10% 50 V 0805" CAPC2013X95X50LL10T25 34.671,68.199 r90 top value=100nF (schematic designator C130)
C130_2 "Capacitor 100 nF +/-10% 50 V 0805" CAPC2013X95X50LL10T25 64.135,69.723 r90 top value=100nF (schematic designator C130)
C130_3 "Capacitor 100 nF +/-10% 50 V 0805" CAPC2013X95X50LL10T25 94.615,70.231 r90 top value=100nF (schematic designator C130)
C130_4 "Capacitor 100 nF +/-10% 50 V 0805" CAPC2013X95X50LL10T25 123.952,70.231 r90 top value=100nF (schematic designator C130)
C131 "Capacitor 0.1 uF +/- 5% 16 V 0402" CAPC1005X56X25LL10T15 48.895,145.161 r90 top value=100nF
C132 "Capacitor 0.1 uF +/- 5% 16 V 0402" CAPC1005X56X25LL10T15 59.563,142.494 r270 top value=100nF
C133 "1nF" FP-CL31-IPC_B 60.198,120.777 r90 top
C134 "10uF" FP-GRM31-0_2-MFG 47.625,149.225 r90 top
C135 "10uF" FP-GRM31-0_2-MFG 49.657,149.225 r90 top
C136 "10uF" FP-GRM31-0_2-MFG 50.038,154.94 r180 top
C137 "10uF" FP-GRM31-0_2-MFG 48.387,130.302 r270 top
C138 "10uF" FP-GRM31-0_2-MFG 46.228,130.302 r270 top
CD1 "502774-0891" MOLX-502774-0891_V 156,134.493 r90 top
D1 "SMBJ26A" FP-SMBJ-MFG 46.228,102.235 r90 top
D2 "B5819W" MCC-SOD123_V 74.5,81.976 r90 top
D3 "SM6T7V5A" DIOM5436X265N 64.135,98.298 r0 top
D4 "B5819W" MCC-SOD123_V 55.499,92.456 r90 top
D5 "CZRU52C3V3" FP-0603-SOD-523F-MFG 77.47,108.458 r0 top
D6 "SS54B" SODFL5336X130N 42.799,81.915 r270 top
D7 "B5819W" MCC-SOD123_V 152.146,134.239 r90 bottom
D8 "1N4148WS" DIOD-SOD323-2-A_V 124.714,92.202 r270 top
D9 "LTST-C190KRKT" FP-LTST-C190KRKT-MFG 76.962,104.648 r180 top
D10 "LTST-C190KRKT" FP-LTST-C190KRKT-MFG 102.235,78.486 r270 top
D11_1 "SMBJ26A" FP-SMBJ-MFG 50.8,54.229 r270 top (schematic designator D11)
D11_2 "SMBJ26A" FP-SMBJ-MFG 80.264,55.753 r270 top (schematic designator D11)
D11_3 "SMBJ26A" FP-SMBJ-MFG 110.744,56.261 r270 top (schematic designator D11)
D11_4 "SMBJ26A" FP-SMBJ-MFG 140.081,56.261 r270 top (schematic designator D11)
D12_1 "SMBJ26A" FP-SMBJ-MFG 34.163,54.229 r270 top (schematic designator D12)
D12_2 "SMBJ26A" FP-SMBJ-MFG 63.373,55.753 r270 top (schematic designator D12)
D12_3 "SMBJ26A" FP-SMBJ-MFG 93.853,56.261 r270 top (schematic designator D12)
D12_4 "SMBJ26A" FP-SMBJ-MFG 123.19,56.261 r270 top (schematic designator D12)
D13 "DDZ9699-7" FP-SOD123-IPC_C 64.008,132.207 r270 top
D13_1 "SMBJ22A" FP-SMBJ-MFG 56.769,63.717 r90 bottom (schematic designator D13)
D13_2 "SMBJ22A" FP-SMBJ-MFG 88.233,67.3 r90 bottom (schematic designator D13)
D13_3 "SMBJ22A" FP-SMBJ-MFG 118.713,67.3 r90 bottom (schematic designator D13)
D13_4 "SMBJ22A" FP-SMBJ-MFG 148.05,67.3 r90 bottom (schematic designator D13)
D14 "SMBJ26A" FP-SMBJ-MFG 62.865,139.192 r0 top
D14_1 "SMBJ22A" FP-SMBJ-MFG 45.212,65.913 r180 bottom (schematic designator D14)
D14_2 "SMBJ22A" FP-SMBJ-MFG 77.978,69.8 r90 bottom (schematic designator D14)
D14_3 "SMBJ22A" FP-SMBJ-MFG 108.458,69.8 r90 bottom (schematic designator D14)
D14_4 "SMBJ22A" FP-SMBJ-MFG 137.795,69.8 r90 bottom (schematic designator D14)
D15 "SMBJ26A" FP-SMBJ-MFG 51.943,133.096 r270 top
FB1 "GZ1608D601TF" BEADC1608X95N 131.572,101.219 r0 top
FB2 "GZ1608D601TF" BEADC1608X95N 131.826,105.664 r0 top
J1 "61802525023" 61802525023#1 65.5,44 r0 top
J2 "XT30PW-F" XT30PWF#1 44,119.5 r90 top
J3 "XT30PW-F" XT30PWF#2 45,147.5 r90 top
J4 "61802525023" 61802525023#2 84,150 r0 top
J5 "61802525023" 61802525023#3 137.35,150 r0 top
J6 "61802525023" 61802525023#4 119,44 r0 top
J7 "SM03B-GHS-TB(LF)(SN)" FP-SM03B-GHS-TB_LF_SN-MFG 93.853,118.999 r180 top
J8 "SM03B-GHS-TB(LF)(SN)" FP-SM03B-GHS-TB_LF_SN-MFG 133.604,82.042 r90 top
J9 "61802525023" 61802525023#5 157.5,100.16 r90 top
J10 "MUSB-05-S-B-SM-A" FP-MUSB-05-S-B-SM-A-MFG 158.75,134.62 r90 bottom
J11 "XT30PW-F" XT30PWF#2 45,133.5 r90 top
L1 "IHLP3232DZER220M11 15uH, 63mOhm" INDPM8682X400N 36.322,85.344 r90 top
LED1 "QBLP595-Y" QTB-QBLP595_V 119.38,90.551 r270 top
LED2 "QBLP595-IG" QTB-QBLP595_V 117.729,90.551 r270 top
LED3 "QBLP595-Y" QTB-QBLP595_V 122.428,91.567 r270 top
LED4 "QBLP595-IG" QTB-QBLP595_V 121.539,91.567 r270 top
O1 "XLH536050.000000I" XLH536050000000I 113.03,113.792 r0 top
P1 "FTSH-105-01-F-DV-K" SMTC-FTSH-105-01-L-DV-K_V 82.55,111.506 r225 top
Q1_1 "AOD4126" AOD4185 56.769,56.715 r180 top (schematic designator Q1)
Q1_2 "AOD4126" AOD4185 86.233,58.439 r180 top (schematic designator Q1)
Q1_3 "AOD4126" AOD4185 116.713,58.947 r180 top (schematic designator Q1)
Q1_4 "AOD4126" AOD4185 146.05,58.947 r180 top (schematic designator Q1)
Q2_1 "AOD4126" AOD4185 39.737,56.715 r180 top (schematic designator Q2)
Q2_2 "AOD4126" AOD4185 69.201,58.439 r180 top (schematic designator Q2)
Q2_3 "AOD4126" AOD4185 99.681,58.947 r180 top (schematic designator Q2)
Q2_4 "AOD4126" AOD4185 129.018,58.947 r180 top (schematic designator Q2)
Q3 "BSC060N10NS3 G" INF-PG-TDSON-8-1_V 64.643,119.476 r180 top
Q4 "BSC060N10NS3 G" INF-PG-TDSON-8-1_V 58.293,132.334 r90 top
R1 "1m 2W" FP-PA2512E-0R001-0R004-MFG 42.037,98.552 r90 top value=1mΩ
R2 "200k" FP-RC0603-0_55-IPC_B 35.052,75.931 r90 top
R3 "22K" FP-CRCW0603-e3-IPC_B 65.532,104.14 r0 top
R4 "10KR2F" RESC0402(1005)_L 65.278,102.616 r180 top value=10k
R5 "22K" FP-CRCW0603-e3-IPC_B 35.052,73.152 r90 top
R6 "10KR2F" RESC0402(1005)_L 70.739,80.391 r90 top value=10k
R7 "22K" FP-CRCW0603-e3-IPC_B 69.977,108.204 r90 top
R8 "10KR2F" RESC0402(1005)_L 62.103,108.458 r270 top value=10k
R9 "Resistor 100k +/-1% 0603 100 mW" RESC1608X55X25ML10T15 52.197,87.503 r270 top value=100k
R10 "10.2k" FP-MCT0603-IPC_C 38.608,91.694 r270 top
R11 "20k" FP-CRCW0402-e3-IPC_B 41.783,90.734 r270 top
R12 "10k" FP-CRCW0805-e3-IPC_A 52.324,90.805 r270 top
R13 "1.96k" FP-CRCW0402-e3-MFG 45.72,91.44 r180 top
R14 "Resistor 2K +/-5 % 0402 63 mW" RESC0402(1005)_L 134.239,125.73 r180 top value=2k
R15 "Resistor 100R +/-1 % 0402 63 mW" RESC0402(1005)_L 96.012,131.699 r0 top value=100
R16 "Resistor 100R +/-1 % 0402 63 mW" RESC0402(1005)_L 96.012,130.556 r0 top value=100
R17 "Resistor 100R +/-1 % 0402 63 mW" RESC0402(1005)_L 92.837,128.143 r0 top value=100
R18 "Resistor 100R +/-1 % 0402 63 mW" RESC0402(1005)_L 92.837,127.254 r0 top value=100
R19 "Resistor 100R +/-1 % 0402 63 mW" RESC0402(1005)_L 127.254,126.619 r180 top value=100
R20 "10M" FP-CRGCQ0402-IPC_C 102.743,131.699 r180 top value=10MΩ
R21 "10M" FP-CRGCQ0402-IPC_C 100.711,128.651 r180 top value=10MΩ
R22 "10M" FP-CRGCQ0402-IPC_C 119.38,126.238 r0 top value=10MΩ
R23 "10M" FP-CRGCQ0402-IPC_C 117.348,130.556 r0 top value=10MΩ
R24 "10M" FP-CRGCQ0402-IPC_C 115.189,135.255 r0 top value=10MΩ
R25 "10M" FP-CRGCQ0402-IPC_C 113.254,140.335 r0 top value=10MΩ
R26 "10M" FP-CRGCQ0402-IPC_C 108.966,141.986 r180 top value=10MΩ
R27 "10M" FP-CRGCQ0402-IPC_C 103.251,138.811 r180 top value=10MΩ
R28 "Resistor 100R +/-1 % 0402 63 mW" RESC0402(1005)_L 127.254,127.762 r180 top value=100
R29 "Resistor 100R +/-1 % 0402 63 mW" RESC0402(1005)_L 125.476,130.81 r180 top value=100
R30 "Resistor 100R +/-1 % 0402 63 mW" RESC0402(1005)_L 125.476,132.207 r180 top value=100
R31 "Resistor 100R +/-1 % 0402 63 mW" RESC0402(1005)_L 123.317,135.509 r180 top value=100
R32 "Resistor 100R +/-1 % 0402 63 mW" RESC0402(1005)_L 123.317,136.779 r180 top value=100
R33 "10M" FP-CRGCQ0402-IPC_C 102.743,130.429 r0 top value=10MΩ
R34 "10M" FP-CRGCQ0402-IPC_C 100.711,127.508 r0 top value=10MΩ
R35 "10M" FP-CRGCQ0402-IPC_C 119.38,127.762 r180 top value=10MΩ
R36 "10M" FP-CRGCQ0402-IPC_C 117.348,132.207 r180 top value=10MΩ
R37 "10M" FP-CRGCQ0402-IPC_C 115.189,136.779 r180 top value=10MΩ
R38 "10M" FP-CRGCQ0402-IPC_C 113.284,141.605 r180 top value=10MΩ
R39 "10M" FP-CRGCQ0402-IPC_C 108.966,140.843 r0 top value=10MΩ
R40 "10M" FP-CRGCQ0402-IPC_C 103.251,137.287 r0 top value=10MΩ
R41 "Resistor 100R +/-1 % 0402 63 mW" RESC0402(1005)_L 121.382,140.462 r180 top value=100
R42 "Resistor 100R +/-1 % 0402 63 mW" RESC0402(1005)_L 121.382,141.732 r180 top value=100
R43 "Resistor 100R +/-1 % 0402 63 mW" RESC0402(1005)_L 100.838,142.113 r0 top value=100
R44 "Resistor 100R +/-1 % 0402 63 mW" RESC0402(1005)_L 100.838,140.843 r0 top value=100
R45 "Resistor 100R +/-1 % 0402 63 mW" RESC0402(1005)_L 94.742,138.684 r0 top value=100
R46 "Resistor 100R +/-1 % 0402 63 mW" RESC0402(1005)_L 94.811,137.541 r0 top value=100
R47 "33" FP-AC0603-IPC_A 123.698,85.852 r180 top
R48 "33" FP-AC0603-IPC_A 122.809,78.232 r0 top
R49 "Resistor 120R +/-1% 0603 100 mW" RESC1609X50X30ML08T20 128.905,81.407 r270 top value=120
R51 "10kΩ" FP-AC0603-MFG 126.238,92.202 r90 top
R52 "10kΩ" RESC1608X55X25ML10T15 125.984,96.901 r0 top
R53 "4.7kΩ" RESC2013X60X40ML20T25 112,100.584 r180 top
R54 "11.8kΩ" RESC2013X70X40NL20T20 138.938,106.553 r90 top
R55 "49.9Ω" FP-RT0603-MFG 133.096,98.425 r270 top
R56 "49.9Ω" FP-RT0603-MFG 129.667,98.425 r270 top
R57 "49.9Ω" FP-RT0603-MFG 128.143,98.425 r270 top
R58 "49.9Ω" FP-RT0603-MFG 131.318,98.425 r270 top
R59 "4.7kΩ" RESC2013X60X40ML20T25 115.57,97.282 r270 top
R60 "10kΩ" FP-AC0603-MFG 113.665,108.077 r180 top
R61 "Resistor 1k +/-1% 0603 100 mW" FP-AC0603-MFG 122.047,111.506 r0 top value=1k
R62 "10kΩ" FP-AC0603-MFG 124.206,110.998 r270 top
R63 "75Ω" FP-RT0603-MFG 148.59,86.741 r0 top
R64 "10kΩ" FP-AC0603-MFG 113.665,104.775 r0 top
R65 "Resistor 1k +/-1% 0603 100 mW" RESC1608X55X25ML10T15 99.695,80.772 r90 top value=1k
R66 "75Ω" FP-RT0603-MFG 148.717,93.091 r0 top
R67 "75Ω" FP-RT0603-MFG 147.955,89.789 r90 top
R68 "75Ω" FP-RT0603-MFG 149.606,89.789 r90 top
R69 "49.9Ω" FP-RT0603-MFG 130.683,109.474 r90 top
R70 "49.9Ω" FP-RT0603-MFG 132.715,109.474 r90 top
R71 "49.9Ω" FP-RT0603-MFG 127.381,109.474 r90 top
R72 "49.9Ω" FP-RT0603-MFG 129.032,109.474 r90 top
R73 "10kΩ" FP-AC0603-MFG 113.665,106.426 r0 top
R74 "10kΩ" FP-AC0603-MFG 118.618,93.472 r90 top
R75 "Resistor 1k +/-1% 0603 100 mW" RESC1608X55X25ML10T15 122.047,94.361 r270 top value=1k
R76 "10kΩ" FP-AC0603-MFG 120.269,93.472 r90 top
R77 "220Ω" FP-RT0603-MFG 119.761,88.011 r90 top
R78 "75Ω" FP-RT0603-MFG 149.225,115.443 r0 top
R79 "75Ω" FP-RT0603-MFG 148.971,121.793 r0 top
R80 "75Ω" FP-RT0603-MFG 149.86,118.618 r90 top
R81 "220Ω" FP-RT0603-MFG 118.11,88.011 r90 top
R82 "75Ω" FP-RT0603-MFG 148.209,118.618 r90 top
R83 "220Ω" FP-RT0603-MFG 123.19,89.027 r90 top
R84 "220Ω" FP-RT0603-MFG 121.539,89.027 r90 top
R85 "22K" FP-CRCW0603-e3-IPC_B 74.803,105.537 r90 top
R86 "10KR2F" RESC0402(1005)_L 129.667,93.853 r270 top value=10k
R87 "22K" FP-CRCW0603-e3-IPC_B 82.042,105.156 r45 top
R88 "10KR2F" RESC0402(1005)_L 98.298,113.792 r180 top value=10k
R89 "10KR2F" RESC0402(1005)_L 108.077,94.742 r270 top value=10k
R90 "10KR2F" RESC0402(1005)_L 138.684,132.461 r0 top value=10k
R91 "10KR2F" RESC0402(1005)_L 112.522,119.38 r180 top value=10k
R92 "22K" FP-CRCW0603-e3-IPC_B 76.835,101.981 r315 top
R93 "22K" FP-CRCW0603-e3-IPC_B 99.949,77.343 r0 top
R94 "10KR2F" RESC0402(1005)_L 79.248,75.819 r0 top value=10k
R95 "33" FP-AC0603-IPC_A 116.84,119.888 r225 top
R96 "33" FP-AC0603-IPC_A 115.443,121.285 r225 top
R97 "10KR2F" RESC0402(1005)_L 83.566,129.921 r90 top value=10k
R98 "10KR2F" RESC0402(1005)_L 82.042,129.921 r90 top value=10k
R99 "10KR2F" RESC0402(1005)_L 110.871,87.63 r180 top value=10k
R100 "10KR2F" RESC0402(1005)_L 113.665,87.63 r0 top value=10k
R101 "0, No pcba" FP-CRCW1206-e3-MFG 149.479,76.581 r270 top
R102_1 "1m 2W" FP-PA2512E-0R001-0R004-MFG 51.054,62.992 r270 top value=1mΩ (schematic designator R102)
R102_2 "1m 2W" FP-PA2512E-0R001-0R004-MFG 80.518,64.516 r270 top value=1mΩ (schematic designator R102)
R102_3 "1m 2W" FP-PA2512E-0R001-0R004-MFG 110.998,65.024 r270 top value=1mΩ (schematic designator R102)
R102_4 "1m 2W" FP-PA2512E-0R001-0R004-MFG 140.335,65.024 r270 top value=1mΩ (schematic designator R102)
R103_1 "10k" FP-CRCW0805-e3-IPC_A 58.658,66.167 r180 top (schematic designator R103)
R103_2 "10k" FP-CRCW0805-e3-IPC_A 88.122,67.691 r180 top (schematic designator R103)
R103_3 "10k" FP-CRCW0805-e3-IPC_A 118.602,68.199 r180 top (schematic designator R103)
R103_4 "10k" FP-CRCW0805-e3-IPC_A 147.939,68.199 r180 top (schematic designator R103)
R104_1 "1m 2W" FP-PA2512E-0R001-0R004-MFG 34.036,62.992 r270 top value=1mΩ (schematic designator R104)
R104_2 "1m 2W" FP-PA2512E-0R001-0R004-MFG 63.246,64.516 r270 top value=1mΩ (schematic designator R104)
R104_3 "1m 2W" FP-PA2512E-0R001-0R004-MFG 93.726,65.024 r270 top value=1mΩ (schematic designator R104)
R104_4 "1m 2W" FP-PA2512E-0R001-0R004-MFG 123.063,65.024 r270 top value=1mΩ (schematic designator R104)
R105_1 "10k" FP-CRCW0805-e3-IPC_A 40.259,63.627 r0 top (schematic designator R105)
R105_2 "10k" FP-CRCW0805-e3-IPC_A 69.723,65.151 r0 top (schematic designator R105)
R105_3 "10k" FP-CRCW0805-e3-IPC_A 100.203,65.659 r0 top (schematic designator R105)
R105_4 "10k" FP-CRCW0805-e3-IPC_A 129.54,65.659 r0 top (schematic designator R105)
R106 "0, No PCBA" FP-RMCF1210-IPC_A 66.802,126.746 r180 top
R107 "10 1w" FP-AC2512-MFG 58.928,126.873 r0 top value=10Ω
R108 "10k 0.66W" FP-CRGP1206-IPC_C 57.15,120.65 r90 top value=10KΩ
R109 "1m 2W" FP-PA2512E-0R001-0R004-MFG 53.975,139.065 r180 top value=1mΩ
R110 "200k" FP-RC0603-0_55-IPC_B 49.022,125.603 r0 top
R111 "22K" FP-CRCW0603-e3-IPC_B 49.022,127.381 r180 top
RT1 "47K" FP-NCP18-0_15-IPC_A 72.341,81.722 r90 top
T1 "HX1188NL" FP-HX1188NL-MFG 141.732,90.805 r0 top
T2 "HX1188NL" FP-HX1188NL-MFG 142.113,118.618 r0 top
TP1 "TPAD6R" TP06R#3 47.752,115.824 r90 top
TP2 "TPAD6R" TP06R#4 41.903,94.473 r90 top
TP3 "TPAD6R" TP06R#5 58.42,85.725 r90 top
TP4 "TPAD6R" TP06R#6 66.675,65.227 r90 top
TP5 "TPAD6R" TP06R#4 76.073,107.188 r90 top
TP6 "TPAD6R" TP06R#7 60.008,70.993 r90 top
TP7 "TPAD6R" TP06R#8 51.246,97.524 r90 top
TP13 "TPAD6R" TP06R#4 100.457,132.969 r90 top
TP14 "TPAD6R" TP06R#4 101.6,129.286 r90 top
TP15 "TPAD6R" TP06R#9 108.712,133.096 r90 top
TP16 "TPAD6R" TP06R#4 113.792,125.349 r90 top
TP17 "TPAD6R" TP06R#4 107.188,125.857 r90 top
TP18 "TPAD6R" TP06R#4 102.362,139.827 r90 top
TP19 "TPAD6R" TP06R#4 100.838,136.398 r90 top
TP20 "TPAD6R" TP06R#4 129.794,103.886 r90 top
TP21 "TPAD6R" TP06R#4 123.825,96.901 r90 top
TP22 "TPAD6R" TP06R#10 119.761,108.966 r90 top
TP23 "TPAD6R" TP06R#4 115.697,106.426 r90 top
TP24 "TPAD6R" TP06R#4 125.603,110.109 r90 top
TP28 "TPAD6R" TP06R#11 57.912,140.97 r270 top
TP29 "TPAD6R" TP06R#4 64.643,129.413 r90 top
TP30 "TPAD6R" TP06R#12 50.165,124.333 r90 top
TP31 "TPAD6R" TP06R#4 50.292,141.859 r270 top
TP32 "TPAD6R" TP06R#4 55.626,135.128 r0 top
TPC1 "TPAD6R" TP06R#13 146.431,109.855 r90 top
TPCS1 "TPAD6R" TP06R#14 115.062,117.983 r90 top
TPG1 "TPAD6R" TP06R#4 140.462,110.49 r90 top
TPL1_1 "TPAD6R" TP06R#4 48.26,58.801 r90 top (schematic designator TPL1)
TPL1_2 "TPAD6R" TP06R#4 77.724,60.325 r90 top (schematic designator TPL1)
TPL1_3 "TPAD6R" TP06R#4 108.204,60.833 r90 top (schematic designator TPL1)
TPL1_4 "TPAD6R" TP06R#4 137.541,60.833 r90 top (schematic designator TPL1)
TPL2_1 "TPAD6R" TP06R#4 37.084,63.627 r90 top (schematic designator TPL2)
TPL2_2 "TPAD6R" TP06R#4 66.548,65.151 r90 top (schematic designator TPL2)
TPL2_3 "TPAD6R" TP06R#4 97.028,65.659 r90 top (schematic designator TPL2)
TPL2_4 "TPAD6R" TP06R#4 126.365,65.659 r90 top (schematic designator TPL2)
TPLA1_1 "TPAD6R" TP06R#4 35.814,66.675 r90 top (schematic designator TPLA1)
TPLA1_2 "TPAD6R" TP06R#4 65.278,68.199 r90 top (schematic designator TPLA1)
TPLA1_3 "TPAD6R" TP06R#4 95.758,68.707 r90 top (schematic designator TPLA1)
TPLA1_4 "TPAD6R" TP06R#4 125.095,68.707 r90 top (schematic designator TPLA1)
TPLB1_1 "TPAD6R" TP06R#4 53.34,65.151 r90 top (schematic designator TPLB1)
TPLB1_2 "TPAD6R" TP06R#4 82.804,66.675 r90 top (schematic designator TPLB1)
TPLB1_3 "TPAD6R" TP06R#4 113.284,67.183 r90 top (schematic designator TPLB1)
TPLB1_4 "TPAD6R" TP06R#4 142.621,67.183 r90 top (schematic designator TPLB1)
TPMISO1 "TPAD6R" TP06R#4 109.347,121.158 r90 top
TPMOSI1 "TPAD6R" TP06R#4 110.353,120.246 r90 top
TPSCLK1 "TPAD6R" TP06R#15 108.204,120.269 r90 top
U1 "INA240A4DR" SOIC127P600X175-8N 50.673,97.536 r90 top
U2 "LM358DR2G" ONSC-SOIC-8-751-07_V 58.674,103.505 r180 top
U3 "LM358DR2G" ONSC-SOIC-8-751-07_V 40.132,74.422 r0 top
U4 "SY6280AAAC" SOT95P285X140-5N 65.278,108.077 r180 top
U5 "LM1084IS-3.3RG" KTT0003B_N 64.008,87.907 r270 top
U6 "TPS54331DR" SOIC127P600X175-8N 46.863,87.376 r180 top
U7 "LDL1117S33R" FP-SOT223-0046067-IPC_C 145.288,135.001 r180 bottom
U8 "SST25VF016B-50-4C-S2AF" MCHP-SOIC-S2A8_M 133.468,135.782 r270 top
U9 "AD7173-8BCPZ" FP-CP-40-14-IPC_C 110.9,129.171 r0 top
U10 "TCAN332DCNR" FP-DCN0008A-IPC_A 124.594,81.351 r0 top
U11 "KSZ8863RLLI" FP-LQFP7x7-48LD-PL-1-IPC_B 122.555,103.505 r180 top
U12 "STM32H743ZIT6" QFP50P2200X2200X160-144N 91.8,95 r45 top
U13 "MPU6050" MPU6050 78.994,127.889 r270 top
U14 "MS560702BA03-50" MS5607-02BA03 113.538,84.455 r90 top
U15 "00472" 00472 70.739,136.017 r270 top
U16 "3966" 3966 152.527,71.247 r270 top
U17_1 "INA240A4DR" SOIC127P600X175-8N 46.228,63.5 r270 top (schematic designator U17)
U17_2 "INA240A4DR" SOIC127P600X175-8N 75.692,65.024 r270 top (schematic designator U17)
U17_3 "INA240A4DR" SOIC127P600X175-8N 106.172,65.532 r270 top (schematic designator U17)
U17_4 "INA240A4DR" SOIC127P600X175-8N 135.509,65.532 r270 top (schematic designator U17)
U18_1 "UCC27624DR" SOIC127P600X175-8N 54.102,70.739 r270 top (schematic designator U18)
U18_2 "UCC27624DR" SOIC127P600X175-8N 83.566,72.263 r270 top (schematic designator U18)
U18_3 "UCC27624DR" SOIC127P600X175-8N 114.046,72.771 r270 top (schematic designator U18)
U18_4 "UCC27624DR" SOIC127P600X175-8N 143.383,72.771 r270 top (schematic designator U18)
U19_1 "INA240A4DR" SOIC127P600X175-8N 39.751,67.31 r180 top (schematic designator U19)
U19_2 "INA240A4DR" SOIC127P600X175-8N 69.215,68.834 r180 top (schematic designator U19)
U19_3 "INA240A4DR" SOIC127P600X175-8N 99.695,69.342 r180 top (schematic designator U19)
U19_4 "INA240A4DR" SOIC127P600X175-8N 129.032,69.342 r180 top (schematic designator U19)
U20 "INA240A4DR" SOIC127P600X175-8N 53.34,144.526 r180 top
U21 "LTC4359HMS8#PBF" SOP65P490X110-8N 53.721,119.634 r90 top
U22 "LM358DR2G" ONSC-SOIC-8-751-07_V 48.641,119.38 r270 top
XF1 "696105003002" 696105003002 41.529,109.855 r0 top

## Footprints (in the part's own frame and the unit in brackets; to place one, negate y for a bottom-side part, rotate by r counter-clockwise, add the part's x,y. Pads: shape width x height; smd on the part's side, far side on the other; paste and mask are expansions set on the pad)
00472 [mm]
  oval 1.75x2.2 hole 1.11: 1(0,0) 4(7.62,0) 5(10.16,0) 6(12.7,0)
  round 1.665 hole 1.11: 2(2.54,0) 7(2.54,17.78) 10(10.16,17.78)
  oval 1.665x2.2 hole 1.11: 3(5.08,0)
  round 1.2 hole 1.11: 8(5.08,17.78)
  oval 2.2x1.75 hole 1.11: 9(7.62,17.78)
  round 2.54 hole 2.54: MH1(-4.445,1.27) MH2(17.145,1.27) MH3(-4.445,16.51) MH4(17.145,16.51)
  silkscreen extent -6.99,-1.27 19.68,19.05, body extent -6.99,-1.27 19.68,19.05, height 2.1
3966 [mm]
  round 1.8 hole 1.11: 1(0,0) 3(5.08,0) 4(7.62,0) 6(12.7,0) 7(15.24,0) 8(17.78,0)
  round 1.665 hole 1.11: 2(2.54,0) 5(10.16,0)
  round 3.81 hole 2.54: MH1(0,11.43) MH2(17.78,11.43)
  silkscreen extent -3.1,-2.54 16.51,13.97, body extent -1.91,-2.54 19.69,13.97, height 3.1
61802525023#1 [mm]
  rect 1.7x2 hole 1: 1(-16.62,1.42)
  oval 1.9x2.2 hole 1: 2(-13.85,1.42) 3(-11.08,1.42) 6(-2.77,1.42) 9(5.54,1.42) 10(8.31,1.42) 11(11.08,1.42) 12(13.85,1.42) 13(16.62,1.42) 14(-15.235,-1.42) 15(-12.465,-1.42) 16(-9.695,-1.42) 17(-6.925,-1.42) 18(-4.155,-1.42) 19(-1.385,-1.42) 20(1.385,-1.42) 21(4.155,-1.42) 23(9.695,-1.42) 24(12.465,-1.42) 25(15.235,-1.42)
  round 1.9 hole 1: 4(-8.31,1.42) 7(0,1.42) 22(6.925,-1.42)
  oval 1.8x2.2 hole 1: 5(-5.54,1.42) 8(2.77,1.42)
  round 4.95 hole 3.3: M1(-23.52,0) M2(23.52,0)
  silkscreen extent -26.52,-6.25 26.52,6.25, body extent -26.52,-6.25 26.52,6.25, height 12.97
61802525023#2 [mm]
  rect 1.7x2 hole 1: 1(-16.62,1.42)
  oval 1.9x2.2 hole 1: 2(-13.85,1.42) 3(-11.08,1.42) 4(-8.31,1.42) 6(-2.77,1.42) 7(0,1.42) 9(5.54,1.42) 10(8.31,1.42) 11(11.08,1.42) 12(13.85,1.42) 13(16.62,1.42) 14(-15.235,-1.42) 15(-12.465,-1.42) 16(-9.695,-1.42) 17(-6.925,-1.42) 18(-4.155,-1.42) 19(-1.385,-1.42) 20(1.385,-1.42) 21(4.155,-1.42) 22(6.925,-1.42) 23(9.695,-1.42) 24(12.465,-1.42) 25(15.235,-1.42)
  oval 1.8x2.2 hole 1: 5(-5.54,1.42) 8(2.77,1.42)
  round 4.95 hole 3.3: M1(-23.52,0) M2(23.52,0)
  silkscreen extent -26.52,-6.25 26.52,6.25, body extent -26.52,-6.25 26.52,6.25, height 12.97
61802525023#3 [mm] "25 pins, straight"
  rect 1.7x2 hole 1: 1(-16.62,1.42)
  oval 1.9x2.2 hole 1: 2(-13.85,1.42) 3(-11.08,1.42) 4(-8.31,1.42) 6(-2.77,1.42) 7(0,1.42) 8(2.77,1.42) 9(5.54,1.42) 10(8.31,1.42) 11(11.08,1.42) 12(13.85,1.42) 13(16.62,1.42) 14(-15.235,-1.42) 15(-12.465,-1.42) 16(-9.695,-1.42) 17(-6.925,-1.42) 18(-4.155,-1.42) 19(-1.385,-1.42) 20(1.385,-1.42) 21(4.155,-1.42) 22(6.925,-1.42) 23(9.695,-1.42) 24(12.465,-1.42) 25(15.235,-1.42)
  oval 1.8x2.2 hole 1: 5(-5.54,1.42)
  round 4.95 hole 3.3: M1(-23.52,0) M2(23.52,0)
  silkscreen extent -26.52,-6.25 26.52,6.25, body extent -26.52,-6.25 26.52,6.25, height 12.97
61802525023#4 [mm]
  rect 1.7x2 hole 1: 1(-16.62,1.42)
  oval 1.9x2.2 hole 1: 2(-13.85,1.42) 3(-11.08,1.42) 4(-8.31,1.42) 6(-2.77,1.42) 7(0,1.42) 9(5.54,1.42) 10(8.31,1.42) 11(11.08,1.42) 12(13.85,1.42) 13(16.62,1.42) 14(-15.235,-1.42) 15(-12.465,-1.42) 16(-9.695,-1.42) 17(-6.925,-1.42) 18(-4.155,-1.42) 19(-1.385,-1.42) 20(1.385,-1.42) 21(4.155,-1.42) 22(6.925,-1.42) 24(12.465,-1.42) 25(15.235,-1.42)
  round 1.8 hole 1: 5(-5.54,1.42) 8(2.77,1.42)
  round 1.9 hole 1: 23(9.695,-1.42)
  round 4.95 hole 3.3: M1(-23.52,0) M2(23.52,0)
  silkscreen extent -26.52,-6.25 26.52,6.25, body extent -26.52,-6.25 26.52,6.25, height 12.97
61802525023#5 [mm] "25 pins, straight"
  rect 1.7x2.2 hole 1: 1(-16.62,1.42)
  oval 1.75x2.2 hole 1: 2(-13.85,1.42) 3(-11.08,1.42) 4(-8.31,1.42) 7(0,1.42) 10(8.31,1.42) 14(-15.235,-1.42) 15(-12.465,-1.42) 16(-9.695,-1.42) 17(-6.925,-1.42) 19(-1.385,-1.42) 20(1.385,-1.42) 22(6.925,-1.42)
  round 1.5 hole 1: 5(-5.54,1.42) 6(-2.77,1.42) 8(2.77,1.42) 9(5.54,1.42) 18(-4.155,-1.42) 21(4.155,-1.42)
  oval 1.75x2 hole 1: 11(11.08,1.42) 12(13.85,1.42) 13(16.62,1.42) 23(9.695,-1.42) 24(12.465,-1.42) 25(15.235,-1.42)
  round 4.95 hole 3.3: M1(-23.52,0) M2(23.52,0)
  silkscreen extent -26.52,-6.25 26.52,6.25, body extent -26.52,-6.25 26.52,6.25, height 12.97
696105003002 [mm]
  round 3 hole 1.5: 1(-7.5,0) 2(7.5,0)
  round 2.6 hole 2.6 unplated: MH1(0,0)
  silkscreen extent -12.2,-4.7 12.2,4.7, body extent -12.2,-4.7 12.2,4.7, height 11.55
AOD4185 [mm]
  rect 1.5x3 smd: 1(-2.286,-4.2) 3(2.286,-4.2)
  rect 6.25x6.8 smd: 2(0,2.4)
  silkscreen extent -3.3,-6.3 3.3,4.2, body extent -3.3,-5 3.3,5.1, height 2.4
BEADC1608X95N [mm]
  rect 0.9x1 smd: 1(-0.8,0) 2(0.8,0)
  silkscreen extent 0,-0.3 0,0.3, body extent -0.8,-0.4 0.8,0.4, height 0.95
CAPC0402(1005)60_L [mm] "Chip Capacitor, Body 1.0x0.5mm, Height 0.6mm, IPC High Density"
  rrect25% 0.5x0.55 smd: 1(-0.45,0) 2(0.45,0)
  silkscreen extent 0,-0.2 0,0.2, body extent -0.5,-0.25 0.5,0.25, height 0.6
CAPC0603(1608)100_L [mm]
  rrect25% 0.66x0.76 smd: 1(-0.7,0) 2(0.7,0)
  silkscreen extent 0,-0.3 0,0.3, body extent -0.8,-0.4 0.8,0.4, height 0.95
CAPC1005X55X25NL05T10 [mm]
  rect 0.66x0.62 smd: 1(-0.44,0) 2(0.44,0)
  body extent -0.53,-0.28 0.53,0.27, height 0.55
CAPC1005X56X25LL10T15 [mm]
  rect 0.58x0.54 smd: 1(-0.39,0) 2(0.39,0)
  body extent -0.55,-0.3 0.55,0.3, height 0.56
CAPC1005X60X26LL10T16 [mm]
  rect 0.58x0.54 smd: 1(-0.39,0) 2(0.39,0)
  body extent -0.55,-0.3 0.55,0.3, height 0.6
CAPC1206(3216)190_L [mm] "Chip Capacitor, Body 3.2x1.6mm, Height 1.9mm, IPC High Density"
  rect 0.95x1.7 smd: 1(-1.4,0) 2(1.4,0)
  silkscreen extent -0.55,-0.75 0.55,0.75, body extent -1.7,-0.9 1.7,0.9, height 1.9
CAPC1210(3225)170_M [mm] "Chip Capacitor, Body 3.2x2.5mm, Height 1.7mm, IPC Low Density"
  rect 1.35x2.8 smd: 1(-1.6,0) 2(1.6,0)
  silkscreen extent -0.55,-1.3 0.55,1.3, body extent -1.7,-1.35 1.7,1.35, height 1.7
CAPC1210(3225)280_L [mm] "Chip Capacitor, Body 3.2x2.5mm, Height 2.8mm, IPC High Density"
  rect 0.95x2.6 smd: 1(-1.4,0) 2(1.4,0)
  silkscreen extent -0.55,-1.2 0.55,1.2, body extent -1.7,-1.4 1.7,1.4, height 2.8
CAPC1608X90X40LL10T20 [mm]
  rect 0.85x0.85 smd: 1(-0.575,0) 2(0.575,0)
  body extent -0.85,-0.45 0.85,0.45, height 0.9
CAPC1608X90X40NL10T20 [mm]
  rect 0.95x0.95 smd: 1(-0.625,0) 2(0.625,0)
  body extent -0.85,-0.45 0.85,0.45, height 0.9
CAPC1608X94X35NL15T15 [mm] "Chip Capacitor, 2-Leads, Body 1.75x0.96mm, IPC Medium Density"
  rect 1.05x1 smd: 1(-0.75,0) 2(0.75,0)
  body extent -0.87,-0.48 0.87,0.48, height 0.94
CAPC2013X95X50LL10T25 [mm]
  rect 1.05x1.3 smd: 1(-0.725,0) 2(0.725,0)
  body extent -1.05,-0.67 1.05,0.67, height 0.95
CAPC2013X100X50NL20T25 [mm]
  rect 1.3x1.45 smd: 1(-0.8,0) 2(0.8,0)
  body extent -1.1,-0.72 1.1,0.72, height 1
DIOD-SOD323-2-A_V [mm] "SOD-323, 2-Leads, Body 1.7x1.3mm, Lead Span 2.5mm"
  rect 0.59x0.45 smd: 1(-1.055,0) 2(1.055,0)
  silkscreen extent -0.85,-0.65 1.85,0.65, body extent -1.24,-0.7 1.24,0.7, height 1.2
DIOM5436X265N [mm]
  rect 2.2x2.15 smd: 1(-2.2,0) 2(2.2,0)
  silkscreen extent -3.27,-1.81 2.68,1.81, body extent -2.68,-1.86 2.68,1.86, height 2.33
FP-0603-SOD-523F-MFG [mm]
  rect 0.6x0.8 smd paste+0 mask+0: 1(-0.85,0) 2(0.85,0)
  silkscreen extent -1.85,-0.5 0.18,0.5, body extent -1.25,-0.6 1.25,0.6, height 0.25
FP-0805-L_2_01_0_2-W_1_25-MFG [mm]
  rect 1x1.25 smd paste+0 mask+0: 1(-1,0) 2(1,0)
  silkscreen extent -0.13,-0.72 0.13,0.72, body extent -1.6,-0.82 1.6,0.82, height 0.25
FP-AC0603-IPC_A [mm]
  rect 1.059x1.012 smd paste+0 mask+0: 1(-0.877,0) 2(0.877,0)
  silkscreen extent -1.41,-0.91 1.41,0.91, body extent -1.91,-1.01 1.91,1.01, height 0.25
FP-AC0603-MFG [mm]
  rect 0.9x0.8 smd paste+0 mask+0: 1(-0.85,0) 2(0.85,0)
  silkscreen extent -0.85,-0.82 0.85,0.82, body extent -1.4,-0.55 1.4,0.55, height 0.25
FP-AC2512-MFG [mm]
  rect 1.8x4 smd paste+0 mask+0: 1(-3.1,0) 2(3.1,0)
  silkscreen extent -1.83,-1.63 1.83,1.63, body extent -4.1,-2.1 4.1,2.1, height 0.25
FP-C0402-BB-MFG [mm]
  rect 0.52x0.52 smd paste+0 mask+0: 1(-0.4,0) 2(0.4,0)
  silkscreen extent -0.5,-0.64 0.5,0.64, body extent -0.8,-0.4 0.8,0.4, height 0.25
FP-C0603C-CF-MFG [mm]
  rect 0.75x0.9 smd paste+0 mask+0: 1(-0.6,0) 2(0.6,0)
  silkscreen extent -0.87,-0.85 0.88,0.85, body extent -1.2,-0.6 1.2,0.6, height 0.25
FP-C0805C-DN-MFG [mm]
  rect 0.95x1.35 smd paste+0 mask+0: 1(-0.75,0) 2(0.75,0)
  silkscreen extent -1.1,-1.07 1.1,1.07, body extent -1.4,-0.85 1.4,0.85, height 0.25
FP-C1206C-EF-MFG [mm]
  rect 0.95x1.7 smd paste+0 mask+0: 1(-1.4,0) 2(1.4,0)
  silkscreen extent -0.55,-0.9 0.55,0.9, body extent -2,-1 2,1, height 0.25
FP-C1210C476M4PACTU-MFG [mm]
  rect 1.2x2.7 smd paste+0 mask+0: 1(-1.3,0) 2(1.3,0)
  silkscreen extent -0.33,-1.4 0.33,1.4, body extent -2,-1.5 2,1.5, height 0.25
FP-CC0402-MFG [mm]
  rect 0.5x0.5 smd paste+0 mask+0: 1(-0.5,0) 2(0.5,0)
  silkscreen extent -0.53,-0.68 0.53,0.67, body extent -0.87,-0.48 0.87,0.48, height 0.25
FP-CC0603-DA-MFG [mm]
  rect 0.8x0.9 smd paste+0 mask+0: 1(-0.75,0) 2(0.75,0)
  silkscreen extent -0.85,-0.85 0.85,0.85, body extent -1.35,-0.75 1.35,0.75, height 0.25
FP-CGA3E-0_3-0_1-IPC_A [mm]
  rect 0.956x1.206 smd paste+0 mask+0: 1(-1.025,0) 2(1.025,0)
  silkscreen extent -0.25,-0.6 0.25,0.6, body extent -2,-1.1 2,1.1, height 0.25
FP-CL21-IPC_C [mm]
  rect 1.055x1.356 smd paste+0 mask+0: 1(-0.726,0) 2(0.726,0)
  silkscreen extent -1.25,-1.12 1.25,1.12, body extent -1.35,-0.82 1.35,0.82, height 0.25
FP-CL31-IPC_B [mm]
  rect 1.305x1.758 smd paste+0 mask+0: 1(-1.376,0) 2(1.376,0)
  silkscreen extent -0.42,-0.88 0.42,0.88, body extent -2.28,-1.13 2.28,1.13, height 0.25
FP-CP-40-14-IPC_C [mm]
  rect 0.761x0.239 smd paste+0 mask+0: 1(-2.876,2.25)
  rrect100% 0.761x0.239 smd paste+0 mask+0: 2(-2.876,1.75) 3(-2.876,1.25) 4(-2.876,0.75) 5(-2.876,0.25) 6(-2.876,-0.25) 7(-2.876,-0.75) 8(-2.876,-1.25) 9(-2.876,-1.75) 10(-2.876,-2.25) 21(2.876,-2.25) 22(2.876,-1.75) 23(2.876,-1.25) 24(2.876,-0.75) 25(2.876,-0.25) 26(2.876,0.25) 27(2.876,0.75) 28(2.876,1.25) 29(2.876,1.75) 30(2.876,2.25)
  rrect100% 0.239x0.761 smd paste+0 mask+0: 11(-2.25,-2.876) 12(-1.75,-2.876) 13(-1.25,-2.876) 14(-0.75,-2.876) 15(-0.25,-2.876) 16(0.25,-2.876) 17(0.75,-2.876) 18(1.25,-2.876) 19(1.75,-2.876) 20(2.25,-2.876) 31(2.25,2.876) 32(1.75,2.876) 33(1.25,2.876) 34(0.75,2.876) 35(0.25,2.876) 36(-0.25,2.876) 37(-0.75,2.876) 38(-1.25,2.876) 39(-1.75,2.876) 40(-2.25,2.876)
  rect 4.05x4.05 smd paste-1000 mask+0: 41(0,0)
  silkscreen extent -3.78,-3 3,3, body extent -3.36,-3.36 3.36,3.36, height 0.25
FP-CRCW0402-e3-IPC_B [mm]
  rect 0.568x0.572 smd paste+0 mask+0: 1(-0.452,0) 2(0.452,0)
  silkscreen extent -0.74,-0.69 0.74,0.69, body extent -0.89,-0.44 0.89,0.44, height 0.25
FP-CRCW0402-e3-MFG [mm]
  rect 0.6x0.6 smd paste+0 mask+0: 1(-0.525,0) 2(0.525,0)
  silkscreen extent -0.53,-0.7 0.53,0.7, body extent -0.92,-0.4 0.92,0.4, height 0.25
FP-CRCW0603-e3-IPC_B [mm]
  rect 0.935x0.962 smd paste+0 mask+0: 1(-0.715,0) 2(0.715,0)
  silkscreen extent -0.75,-0.95 0.75,0.9, body extent -1.43,-0.73 1.43,0.73, height 0.25
FP-CRCW0805-e3-IPC_A [mil]
  rect 47.5x59.38 smd paste+0 mask+0: 1(-41.37,0) 2(41.37,0)
  silkscreen extent -3,-25 3,25, body extent -85,-49 85,49, height 10
FP-CRCW1206-e3-MFG [mm]
  rect 1.05x1.8 smd paste+0 mask+0: 1(-1.275,0) 2(1.275,0)
  silkscreen extent -0.38,-0.87 0.38,0.87, body extent -1.9,-1 1.9,1, height 0.25
FP-CRGCQ0402-IPC_C [mm]
  rect 0.56x0.472 smd paste+0 mask+0: 1(-0.376,0) 2(0.376,0)
  silkscreen extent -0.66,-0.67 0.66,0.67, body extent -0.76,-0.38 0.76,0.38, height 0.25
FP-CRGP1206-IPC_C [mm]
  rect 0.956x1.61 smd paste+0 mask+0: 1(-1.301,0) 2(1.301,0)
  silkscreen extent -0.52,-0.85 0.52,0.85, body extent -1.88,-0.95 1.88,0.95, height 0.25
FP-DCN0008A-IPC_A [mm]
  rect 1.805x0.495 smd paste+0 mask+0: 1(-1.15,0.975)
  rrect100% 1.805x0.495 smd paste+0 mask+0: 2(-1.15,0.325) 3(-1.15,-0.325) 4(-1.15,-0.975) 5(1.15,-0.975) 6(1.15,-0.325) 7(1.15,0.325) 8(1.15,0.975)
  silkscreen extent -2.82,-1.7 1.4,1.7, body extent -2.55,-1.95 2.55,1.95, height 0.25
FP-FKD-MFG [mm]
  rect 3.2x1.6 smd paste+0 mask+0: 1(-2.5,0) 2(2.5,0)
  silkscreen extent -4.85,-3.4 3.4,3.4, body extent -4.35,-3.65 4.35,3.65, height 0.25
FP-GRM31-0_2-MFG [mm]
  rect 1.05x1.6 smd paste+0 mask+0: 1(-1.475,0) 2(1.475,0)
  silkscreen extent -0.58,-0.9 0.58,0.9, body extent -2.1,-1 2.1,1, height 0.25
FP-GRM32E-0_3-0_2-IPC_C [mm]
  rect 1.703x2.606 smd paste+0 mask+0: 1(-1.051,0) 2(1.051,0)
  silkscreen extent -1.9,-1.75 1.9,1.75, body extent -2,-1.45 2,1.45, height 0.25
FP-HX1188NL-MFG [mm]
  rect 1.65x0.76 smd paste+0 mask+0: 1(-4.255,4.445) 2(-4.255,3.175) 3(-4.255,1.905) 4(-4.255,0.635) 5(-4.255,-0.635) 6(-4.255,-1.905) 7(-4.255,-3.175) 8(-4.255,-4.445) 9(4.255,-4.445) 10(4.255,-3.175) 11(4.255,-1.905) 12(4.255,-0.635) 13(4.255,0.635) 14(4.255,1.905) 15(4.255,3.175) 16(4.255,4.445)
  silkscreen extent -5.77,-6.42 3.62,6.42, body extent -5.18,-6.52 5.18,6.52, height 0.25
FP-LQFP7x7-48LD-PL-1-IPC_B [mm]
  rect 1.51x0.243 smd paste+0 mask+0: 1(-4.151,2.75)
  rrect100% 1.51x0.243 smd paste+0 mask+0: 2(-4.151,2.25) 3(-4.151,1.75) 4(-4.151,1.25) 5(-4.151,0.75) 6(-4.151,0.25) 7(-4.151,-0.25) 8(-4.151,-0.75) 9(-4.151,-1.25) 10(-4.151,-1.75) 11(-4.151,-2.25) 12(-4.151,-2.75) 25(4.151,-2.75) 26(4.151,-2.25) 27(4.151,-1.75) 28(4.151,-1.25) 29(4.151,-0.75) 30(4.151,-0.25) 31(4.151,0.25) 32(4.151,0.75) 33(4.151,1.25) 34(4.151,1.75) 35(4.151,2.25) 36(4.151,2.75)
  rrect100% 0.243x1.51 smd paste+0 mask+0: 13(-2.75,-4.151) 14(-2.25,-4.151) 15(-1.75,-4.151) 16(-1.25,-4.151) 17(-0.75,-4.151) 18(-0.25,-4.151) 19(0.25,-4.151) 20(0.75,-4.151) 21(1.25,-4.151) 22(1.75,-4.151) 23(2.25,-4.151) 24(2.75,-4.151) 37(2.75,4.151) 38(2.25,4.151) 39(1.75,4.151) 40(1.25,4.151) 41(0.75,4.151) 42(0.25,4.151) 43(-0.25,4.151) 44(-0.75,4.151) 45(-1.25,4.151) 46(-1.75,4.151) 47(-2.25,4.151) 48(-2.75,4.151)
  silkscreen extent -4.28,-2.75 2.75,3.58, body extent -5.16,-5.16 5.16,5.16, height 0.25
FP-LTST-C190KRKT-MFG [mm]
  rect 0.8x0.8 smd paste+0 mask+0: 1(-0.75,0) 2(0.75,0)
  silkscreen extent -1.86,-0.82 0.82,0.82, body extent -1.25,-0.55 1.25,0.55, height 0.25
FP-MCT0603-IPC_C [mm]
  rect 0.664x0.862 smd paste+0 mask+0: 1(-0.629,0) 2(0.629,0)
  silkscreen extent -0.96,-0.87 0.96,0.87, body extent -1.06,-0.58 1.06,0.58, height 0.25